# Altium PCB Copy of MB1363.PcbDoc (part 1 of 6)
Units mm, origin at the board's own origin, x right, y up, seen from the top; angles counter-clockwise.
Board outline 60.78 x 109.88 mm, 4 copper layers (Top Layer, Signal Layer 1, Signal Layer 2, Bottom Layer), stack 0.453 mm thick; 231 components, 215 nets, 716 pads, 2915 vias.
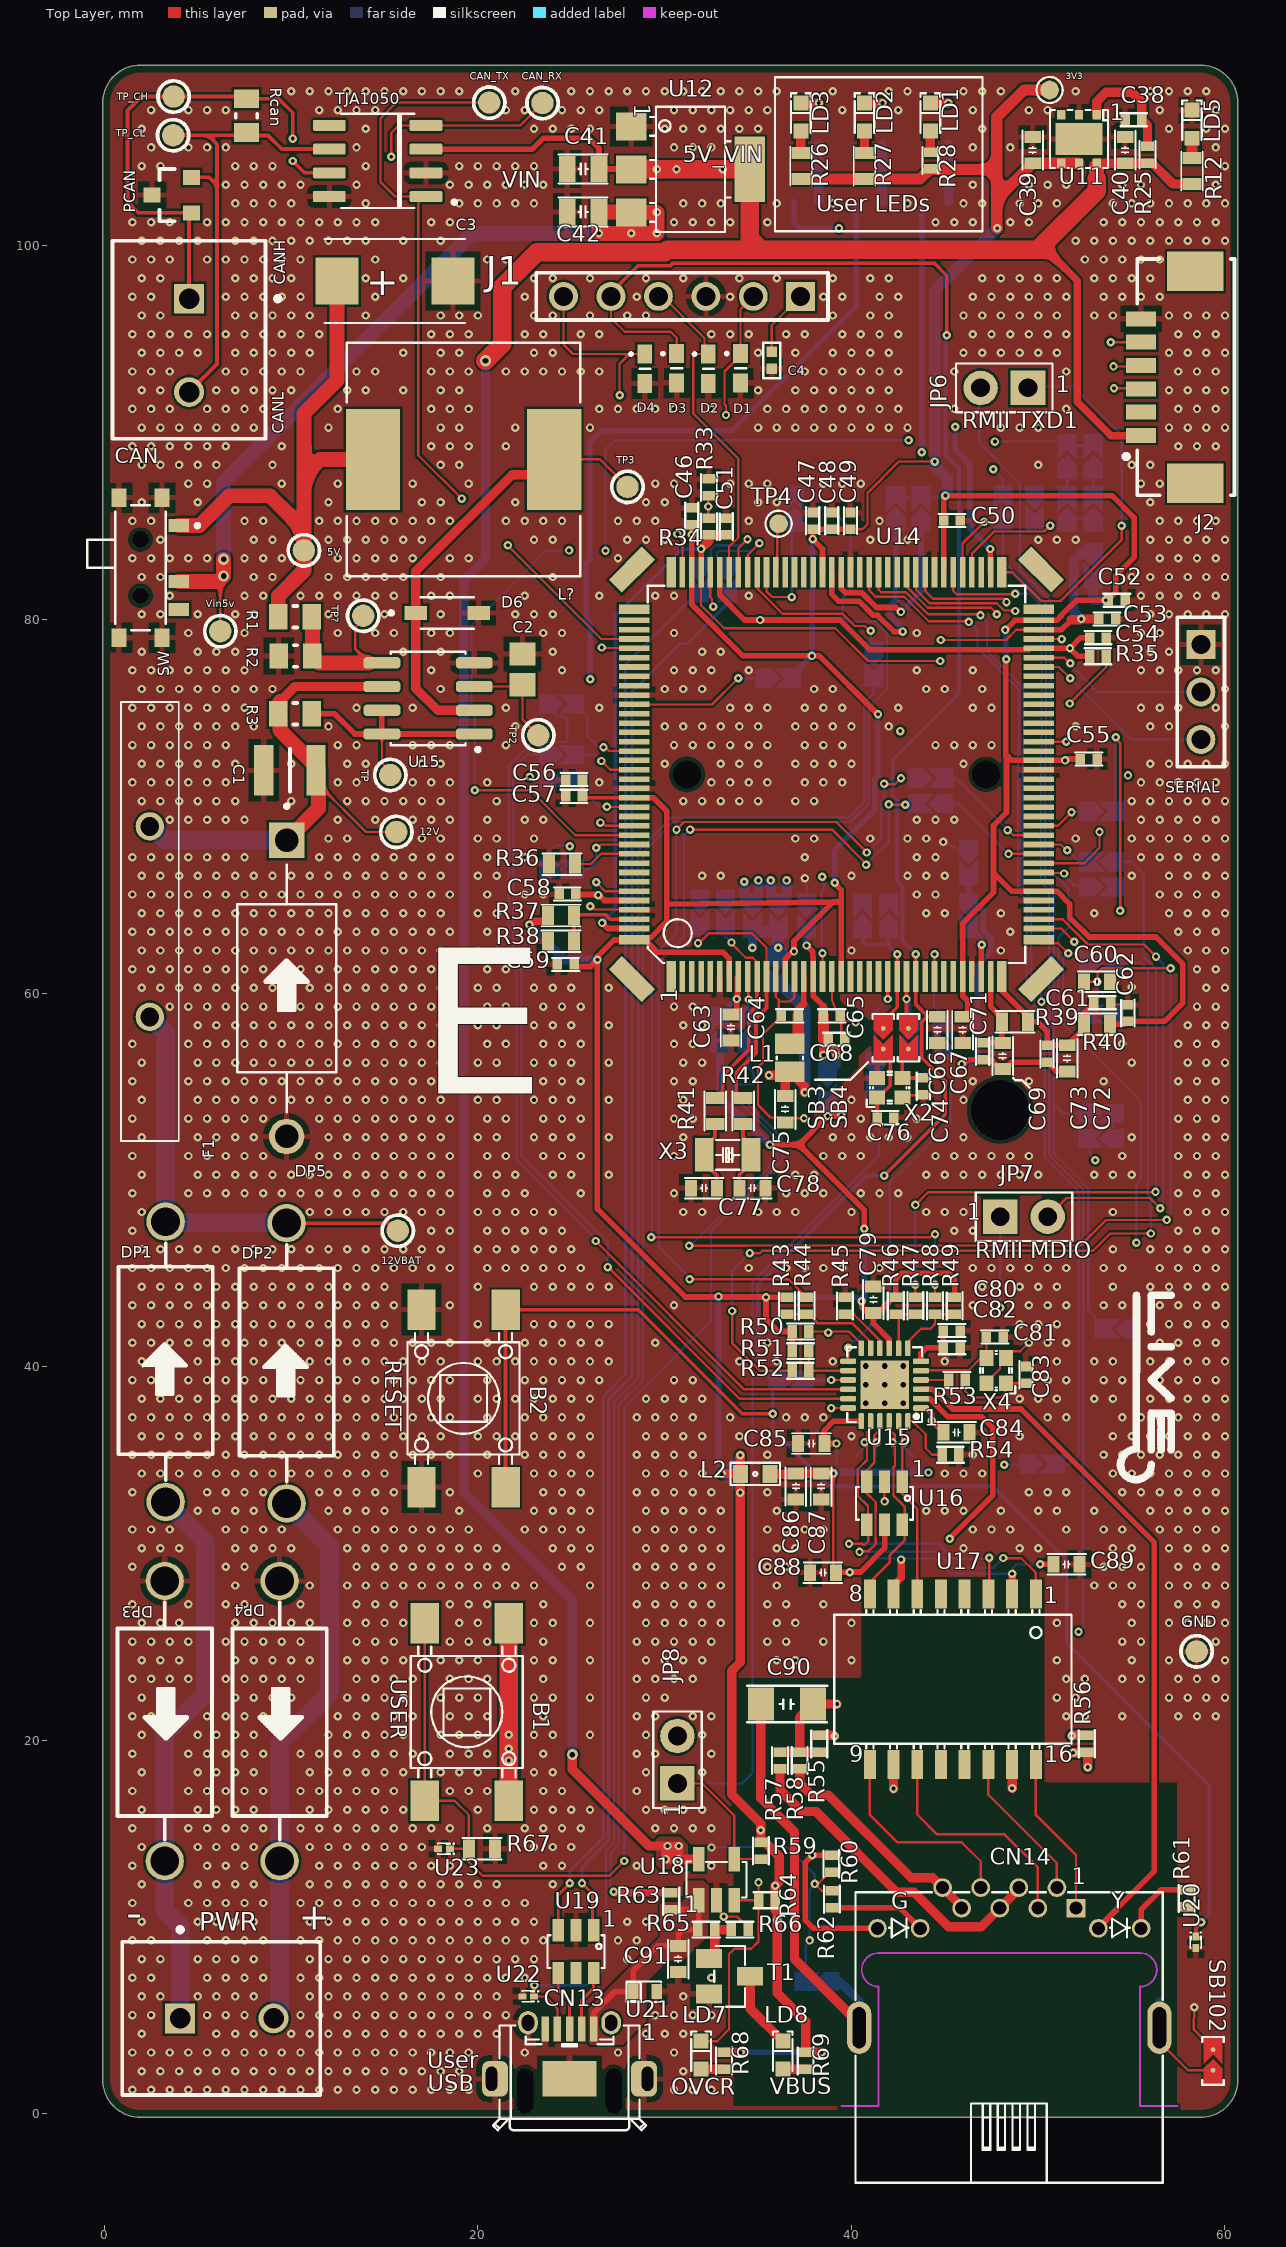
[diagram p0: Top Layer view]
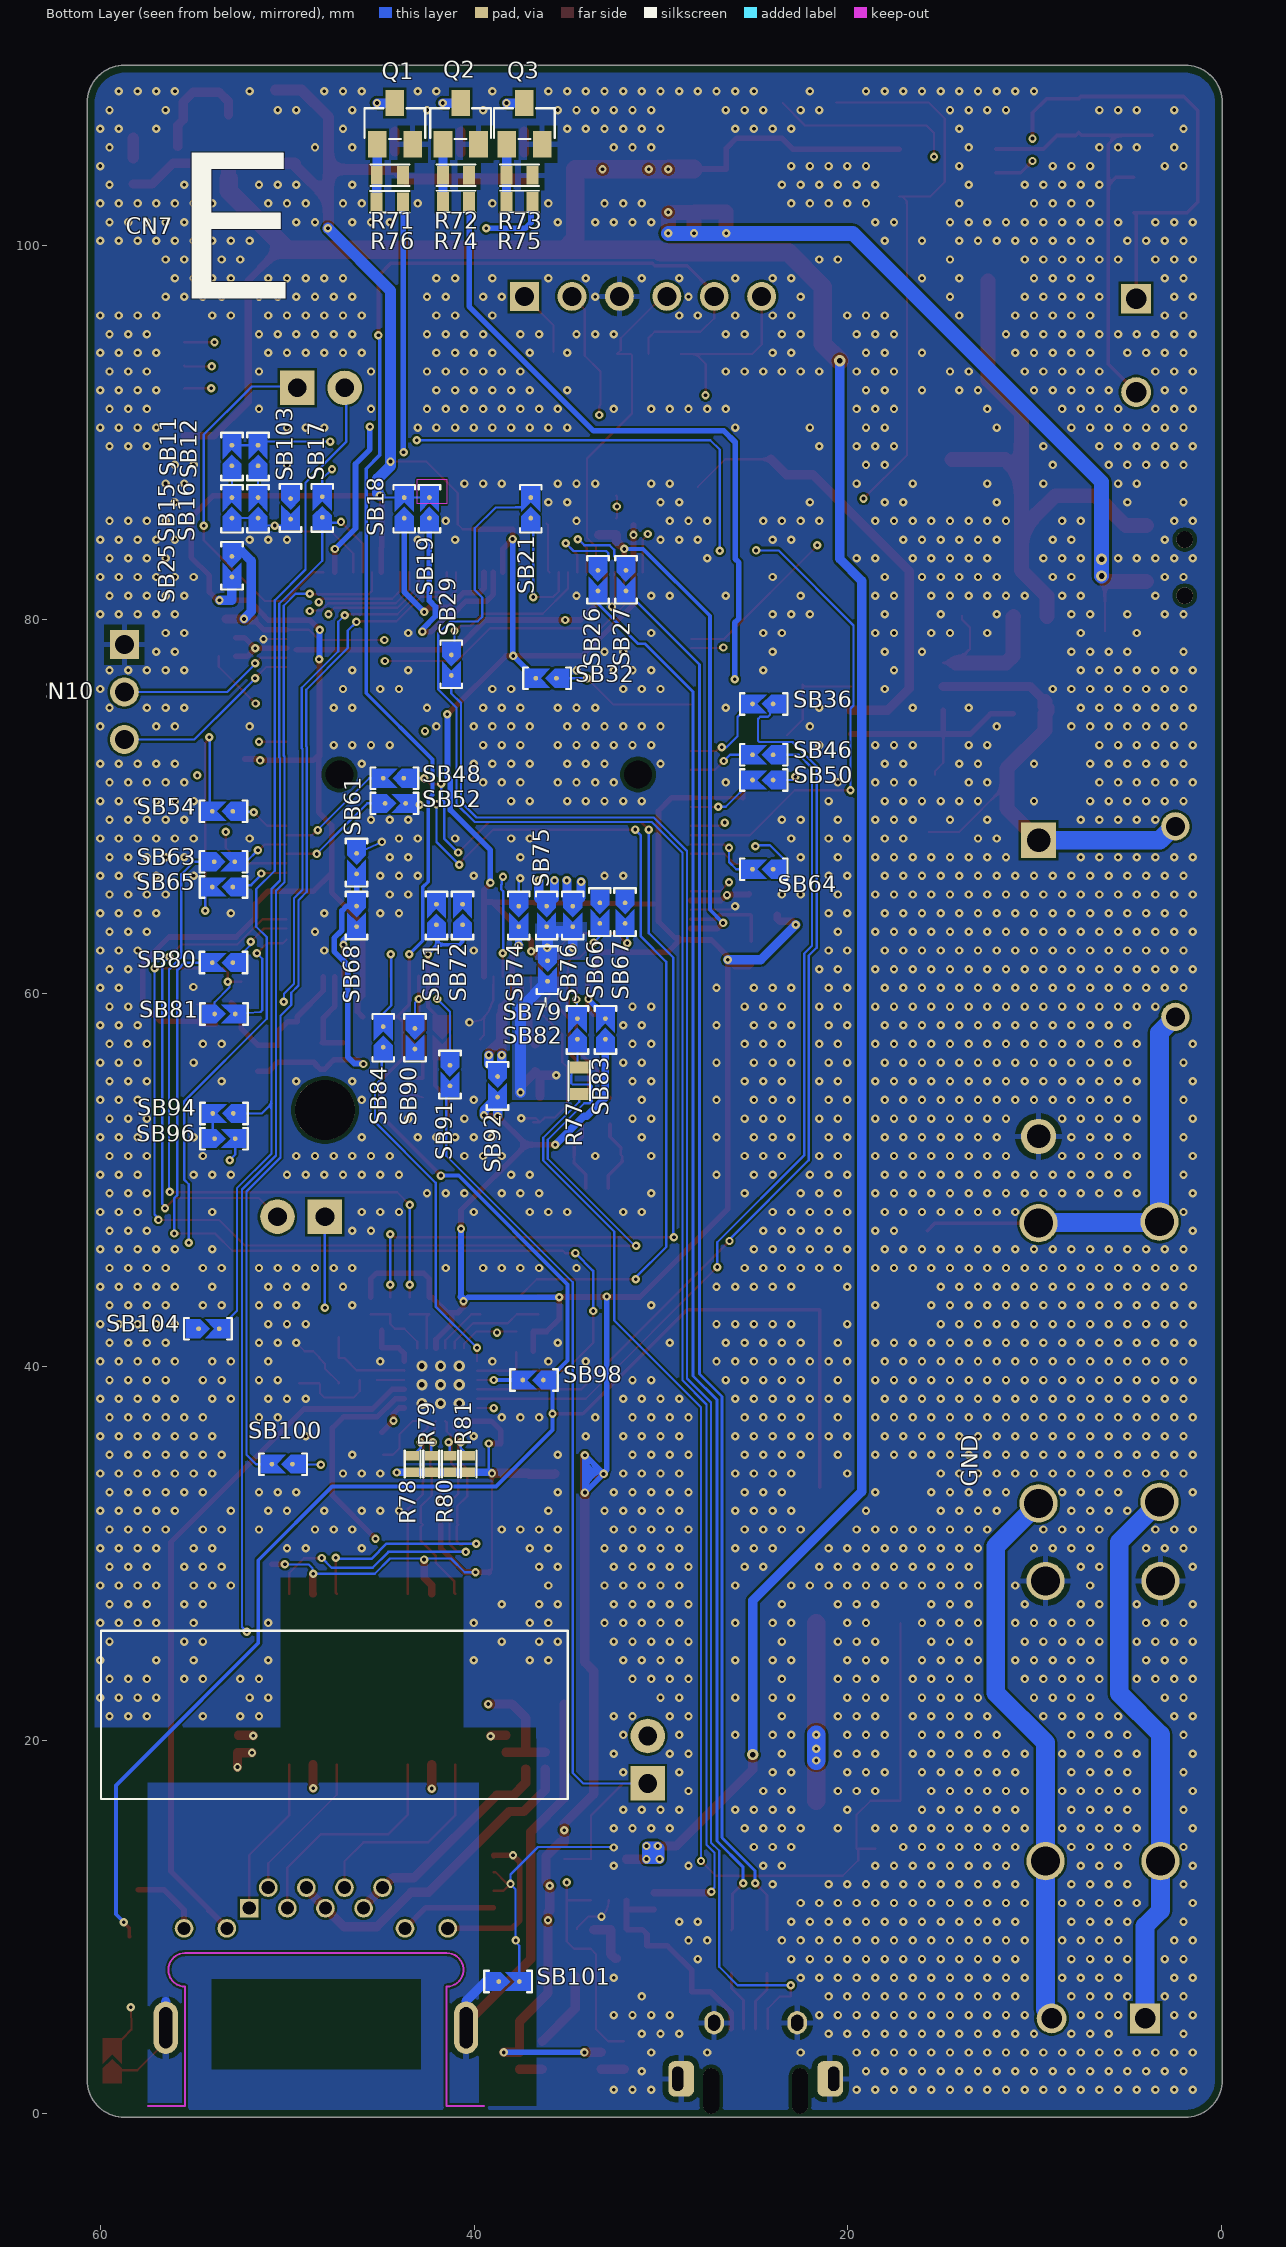
[diagram p1: Bottom Layer view, seen from below]
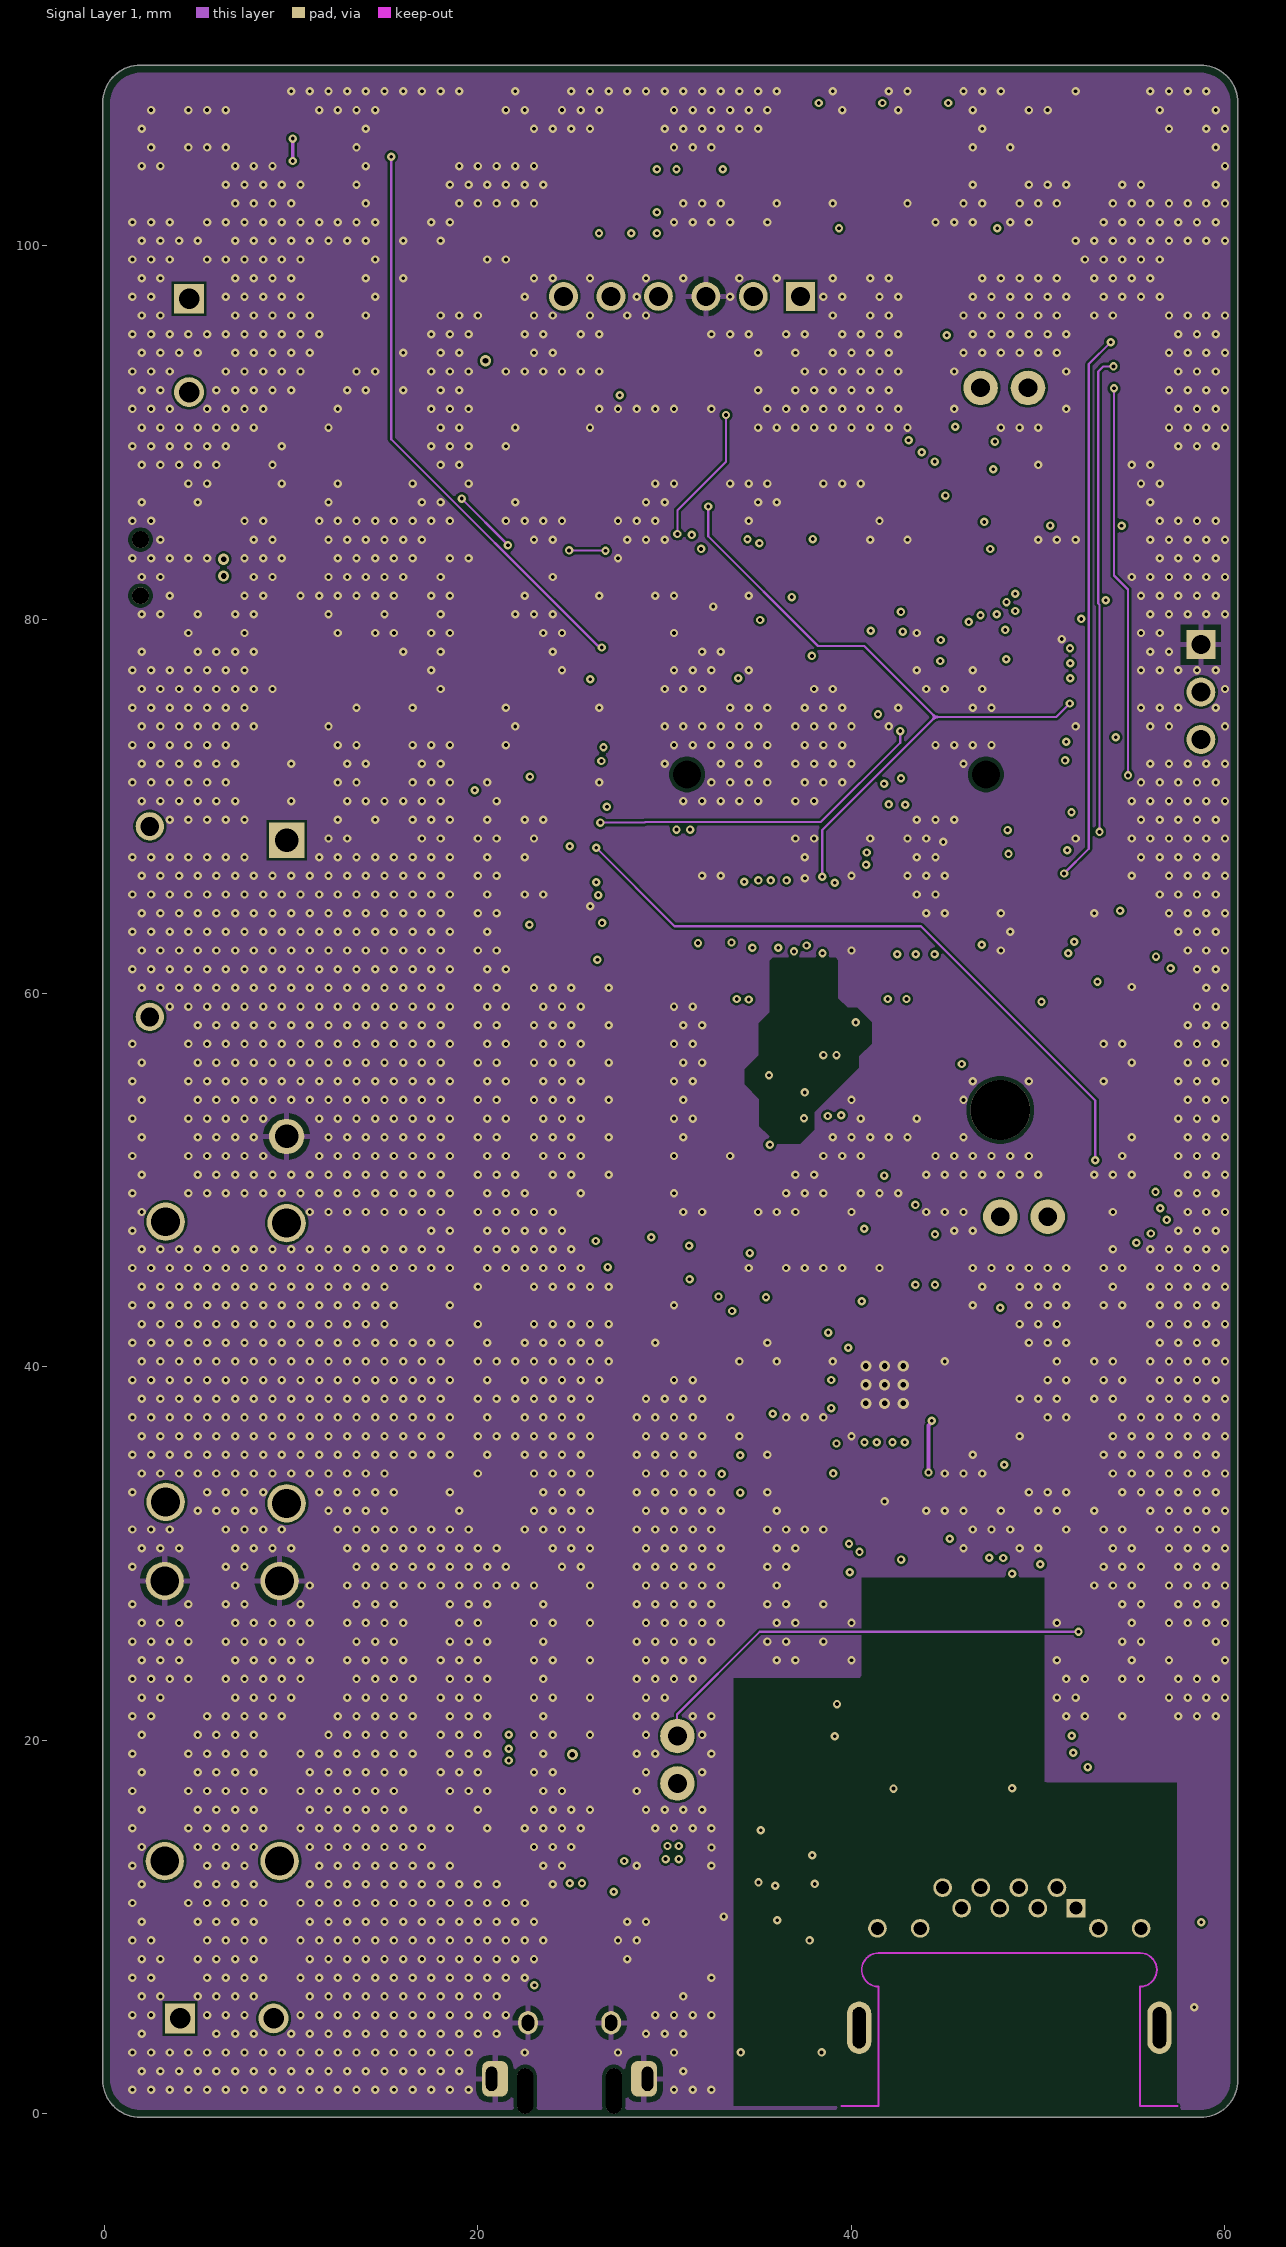
[diagram p2: Signal Layer 1]
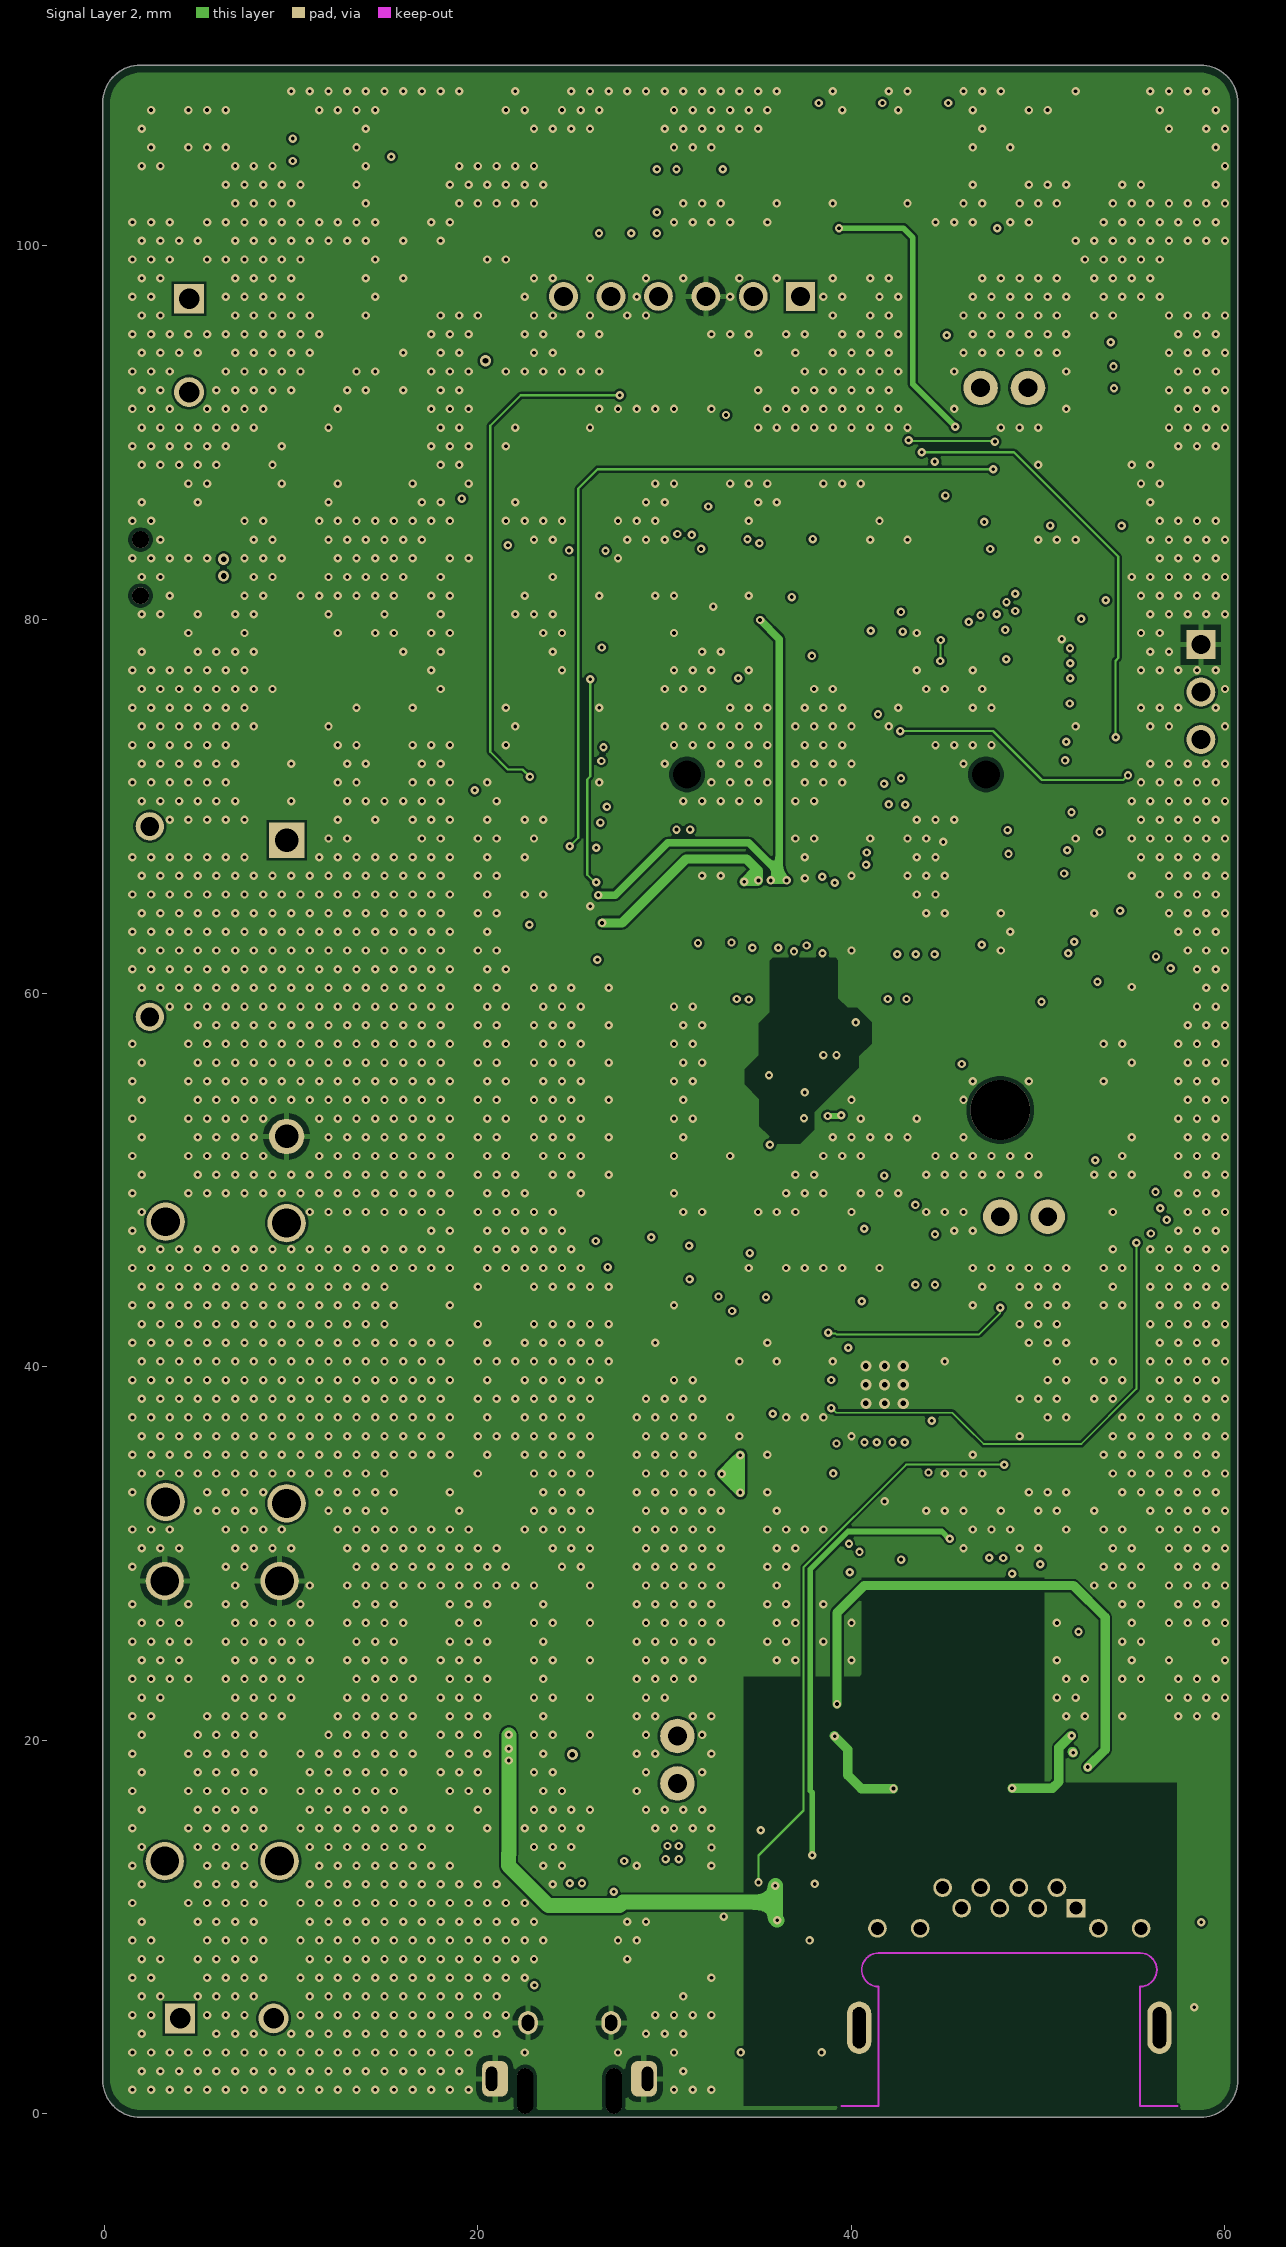
[diagram p3: Signal Layer 2]

## Layer stack, top to bottom
Top Solder: solder mask 0.015, Solder Resist, Dk 3.5
Top Layer: signal copper 0.042
Dielectric 1: prepreg 0.0991, FR-4, Dk 4.2
Signal Layer 1: signal copper 0.0348
Dielectric 2: core 0.1016, Dk 4.2
Signal Layer 2: signal copper 0.0348
Dielectric 3: prepreg 0.0991, Dk 4.2
Bottom Layer: signal copper 0.042
Bottom Solder: solder mask 0.015, Solder Resist, Dk 3.5

## Board outline
-0.064,1.8 -0.064,107.675 cw(c1.936,107.675) 1.936,109.675 58.711,109.675 cw(c58.711,107.675) 60.711,107.675 60.711,1.8 cw(c58.711,1.8) 58.711,-0.2 1.936,-0.2 cw(c1.936,1.8)

## Design rules (kind name [scope] priority, off if disabled: settings)
BoardOutlineClearance [All] p1: gap=0.4 ignorepadtopadclearanceinfootprint=FALSE
Clearance Clearance_GND_L1-1 [InNamedPolygon('GND_L01_P090')] p1: gap=0.4 ignorepadtopadclearanceinfootprint=TRUE
Clearance Clearance_GND_L1-2 [InNamedPolygon('GND_L01_P024')] p2: gap=0.4 ignorepadtopadclearanceinfootprint=TRUE
Clearance Clearance_GND_L3-1 [InNamedPolygon('GND_L03_P092')] p3: gap=0.4 ignorepadtopadclearanceinfootprint=TRUE
Clearance Clearance_GND_L3-2 [InNamedPolygon('GND_L03_P094')] p4: gap=0.4 ignorepadtopadclearanceinfootprint=TRUE
Clearance Clearance_GND_L3-3 [InNamedPolygon('GND_L03_P096')] p5: gap=0.4 ignorepadtopadclearanceinfootprint=TRUE
Clearance Clearance_GND_L3-4 [InNamedPolygon('GND_L03_P098')] p6: gap=0.4 ignorepadtopadclearanceinfootprint=TRUE
Clearance Clearance_GND_L4-1 [InNamedPolygon('GND_L04_P102')] p7: gap=0.4 ignorepadtopadclearanceinfootprint=TRUE
Clearance Clearance_GND_L4-2 [InNamedPolygon('GND_L04_P106')] p8: gap=0.4 ignorepadtopadclearanceinfootprint=TRUE
Clearance Clearance_GND_L4-3 [InNamedPolygon('GND_L04_P000')] p9: gap=0.4 ignorepadtopadclearanceinfootprint=TRUE
Clearance Clearance_GND_L6-1 [InNamedPolygon('GND_L06_P112')] p10: gap=0.4 ignorepadtopadclearanceinfootprint=TRUE
Clearance Clearance_GND_L6-2 [InNamedPolygon('GND_L06_P114')] p11: gap=0.4 ignorepadtopadclearanceinfootprint=TRUE
Clearance Clearance_RMII_SINGLE_50R [InNetClass('NC_RMII_SINGLE_50R')] p12: gap=0.12 ignorepadtopadclearanceinfootprint=TRUE except(0.2: Arc-Hole Track-Hole SMDPad-SMDPad SMDPad-THPad SMDPad-Hole THPad-THPad THPad-Hole Via-Via Via-Hole Fill-Hole Poly-Hole Region-Hole Text-Hole; 0.3: Arc-Fill Arc-Poly Track-Track Track-Fill Track-Poly SMDPad-Fill SMDPad-Poly THPad-Fill THPad-Poly Via-Fill Via-Poly Fill-Fill Fill-Poly Poly-Poly)
Clearance Clearance_VCP_ISO300 [InNetClass('NC_VCP_ISO300')] p13: gap=0.12 ignorepadtopadclearanceinfootprint=TRUE except(0.2: Arc-Hole Track-Hole SMDPad-SMDPad SMDPad-THPad SMDPad-Hole THPad-THPad THPad-Hole Via-Via Via-Hole Fill-Hole Poly-Hole Region-Hole Text-Hole; 0.3: Arc-Fill Arc-Poly Track-Track Track-Fill Track-Poly SMDPad-Fill SMDPad-Poly THPad-Fill THPad-Poly Via-Fill Via-Poly Fill-Fill Fill-Poly Poly-Poly)
Clearance Clearance_USB_DIFF_90R [InNetClass('NC_USB_DIFF_90R')] p14: gap=0.12 ignorepadtopadclearanceinfootprint=TRUE except(0.2: Arc-Hole Track-Hole SMDPad-SMDPad SMDPad-THPad SMDPad-Hole THPad-THPad THPad-Hole Via-Via Via-Hole Fill-Hole Poly-Hole Region-Hole Text-Hole; 0.3: Arc-Fill Arc-Poly Track-Fill Track-Poly SMDPad-Fill SMDPad-Poly THPad-Fill THPad-Poly Via-Fill Via-Poly Fill-Fill Fill-Poly Poly-Poly)
Clearance Clearance_RXTX_DIFF_100R [InNetClass('NC_RXTX_DIFF_100R')] p15: gap=0.12 ignorepadtopadclearanceinfootprint=TRUE except(0.2: Arc-Hole Track-Hole SMDPad-SMDPad SMDPad-THPad SMDPad-Hole THPad-THPad THPad-Hole Via-Via Via-Hole Fill-Hole Poly-Hole Region-Hole Text-Hole; 0.3: Arc-Fill Arc-Poly Track-Fill Track-Poly SMDPad-Fill SMDPad-Poly THPad-Fill THPad-Poly Via-Fill Via-Poly Fill-Fill Fill-Poly Poly-Poly)
Clearance Clearance_STLK_ISO200 [InNetClass('NC_STLK_W200-ISO200')] p16: gap=0.12 ignorepadtopadclearanceinfootprint=TRUE except(0.2: Arc-Poly Arc-Hole Track-Track Track-Poly Track-Hole SMDPad-SMDPad SMDPad-THPad SMDPad-Poly SMDPad-Hole THPad-THPad THPad-Poly THPad-Hole Via-Via Via-Poly Via-Hole Fill-Poly Fill-Hole Poly-Poly Poly-Hole Region-Hole Text-Hole; 0.3: Arc-Fill Track-Fill SMDPad-Fill THPad-Fill Via-Fill Fill-Fill)
Clearance [All] p17: gap=0.12 ignorepadtopadclearanceinfootprint=TRUE except(0.2: Arc-Hole Track-Hole SMDPad-SMDPad SMDPad-THPad SMDPad-Hole THPad-THPad THPad-Hole Via-Via Via-Hole Fill-Hole Poly-Hole Region-Hole Text-Hole; 0.3: Arc-Fill Track-Fill SMDPad-Fill THPad-Fill Via-Fill Fill-Fill)
ComponentClearance [All] p1: gap=0 collisioncheckmode=3 verticalgap=0 showdistances=FALSE
DiffPairsRouting DiffPairsRouting_USB_90R [InDifferentialPairClass('DPC_USB_DIFF_90R')] p1: maxlimit=0.252 minlimit=0.226 mostfreqgap=0.252 toplayer_maxgap=0.226 toplayer_prefgap=0.226 toplayer_minwidth=0.155 toplayer_maxwidth=0.155 toplayer_prefwidth=0.155 midlayer1_maxgap=0.226 midlayer1_prefgap=0.226 midlayer1_minwidth=0.155 midlayer1_maxwidth=0.155 midlayer1_prefwidth=0.155 midlayer2_mingap=0.252 midlayer2_minwidth=0.13 midlayer2_maxwidth=0.13 midlayer2_prefwidth=0.13 bottomlayer_maxgap=0.226 bottomlayer_prefgap=0.226 bottomlayer_minwidth=0.155 bottomlayer_maxwidth=0.155 bottomlayer_prefwidth=0.155 maxuncoupledlength=12.7
DiffPairsRouting DiffPairsRouting_RXTX_100R [InDifferentialPairClass('DPC_RXTX_DIFF_100R')] p2: maxlimit=0.277 minlimit=0.252 mostfreqgap=0.277 toplayer_maxgap=0.252 toplayer_prefgap=0.252 toplayer_minwidth=0.11 toplayer_maxwidth=0.13 toplayer_prefwidth=0.13 midlayer1_maxgap=0.252 midlayer1_prefgap=0.252 midlayer1_minwidth=0.13 midlayer1_maxwidth=0.13 midlayer1_prefwidth=0.13 midlayer2_mingap=0.277 midlayer2_minwidth=0.104 midlayer2_maxwidth=0.104 midlayer2_prefwidth=0.104 bottomlayer_maxgap=0.252 bottomlayer_prefgap=0.252 bottomlayer_minwidth=0.11 bottomlayer_maxwidth=0.13 bottomlayer_prefwidth=0.13 maxuncoupledlength=12.7
FabricationTestPointUsage TestPointUsage [All] p1: valid=0 allowmultiple=FALSE
FabricationTestpoint Testpoint [(IsPad And (OnTopLayer Or OnBottomLayer))] p1: side=3 testpointundercomponent=TRUE minsize=1.016 maxsize=2.54 preferedsize=1.524 minholesize=0 maxholesize=1.016 preferedholesize=0.813 testpointgrid=0.025 allowsidetop=TRUE allowsidebottom=TRUE usegrid=TRUE gridtolerance=0
HoleSize [All] p1: absolutevalues=TRUE maxlimit=3.81 minlimit=0.025 maxpercent=80.000 minpercent=20.000
MinimumSolderMaskSliver [All] p1: minsoldermaskwidth=0
PolygonConnect PolygonConnect_10 [All vs IsNamedPolygon('USB_FS_VBUS_L01_P068')] p1: connectstyle=Direct reliefconductorwidth=0.254 reliefentries=4 polygonreliefangle="90 Angle" airgapwidth=0.254
PolygonConnect PolygonConnect_9 [All vs IsNamedPolygon('5V_L03_P060')] p2: connectstyle=Direct reliefconductorwidth=0.254 reliefentries=4 polygonreliefangle="90 Angle" airgapwidth=0.254
PolygonConnect PolygonConnect_8 [All vs IsNamedPolygon('5V_L01_P058')] p3: connectstyle=Direct reliefconductorwidth=0.254 reliefentries=4 polygonreliefangle="90 Angle" airgapwidth=0.254
PolygonConnect PolygonConnect_7 [All vs IsNamedPolygon('3V3_STLK_L04_P044')] p4: connectstyle=Direct reliefconductorwidth=0.254 reliefentries=4 polygonreliefangle="90 Angle" airgapwidth=0.254
PolygonConnect PolygonConnect_6 [All vs IsNamedPolygon('5V_USB_CHGR_L04_P042')] p5: connectstyle=Direct reliefconductorwidth=0.254 reliefentries=4 polygonreliefangle="90 Angle" airgapwidth=0.254
PolygonConnect PolygonConnect_5 [All vs IsNamedPolygon('5V_L01_P038')] p6: connectstyle=Direct reliefconductorwidth=0.254 reliefentries=4 polygonreliefangle="90 Angle" airgapwidth=0.254
PolygonConnect PolygonConnect_4 [All vs IsNamedPolygon('5V_L01_P038')] p7: thpad.connectstyle=Relief thpad.reliefconductorwidth=0.4 thpad.reliefentries=4 thpad.polygonreliefangle="90 Angle" thpad.airgapwidth=0.4 smdpad.connectstyle=Direct smdpad.reliefconductorwidth=0.254 smdpad.reliefentries=4 smdpad.polygonreliefangle="90 Angle" smdpad.airgapwidth=0.254 via.connectstyle=Direct via.reliefconductorwidth=0.254 via.reliefentries=4 via.polygonreliefangle="90 Angle" via.airgapwidth=0.254
PolygonConnect PolygonConnect_3 [All vs IsNamedPolygon('5V_VIN_L01_P028')] p8: connectstyle=Direct reliefconductorwidth=0.254 reliefentries=4 polygonreliefangle="90 Angle" airgapwidth=0.254
PolygonConnect PolygonConnect_2 [All vs IsNamedPolygon('VIN_L01_P026')] p9: connectstyle=Direct reliefconductorwidth=0.254 reliefentries=4 polygonreliefangle="90 Angle" airgapwidth=0.254
PolygonConnect PolygonConnect_1 [All vs IsNamedPolygon('GND_L01_P024')] p10: connectstyle=Direct reliefconductorwidth=0.254 reliefentries=4 polygonreliefangle="90 Angle" airgapwidth=0.254
PolygonConnect [All] p11: thpad.connectstyle=Relief thpad.reliefconductorwidth=0.3 thpad.reliefentries=4 thpad.polygonreliefangle="90 Angle" thpad.airgapwidth=0.3 smdpad.connectstyle=Relief smdpad.reliefconductorwidth=0.3 smdpad.reliefentries=4 smdpad.polygonreliefangle="90 Angle" smdpad.airgapwidth=0.3 via.connectstyle=Direct via.reliefconductorwidth=0.254 via.reliefentries=4 via.polygonreliefangle="90 Angle" via.airgapwidth=0.254
RoomDefinition U_USB [InComponentClass('U_USB')] p1: confinementstyle=ConfineIn formatcopy=TRUE lockcomponents=FALSE outline -1262.483,-905.725 -1211.683,-905.725 -1211.683,-880.325 -1262.483,-880.325
RoomDefinition U_Power_Board [InComponentClass('U_Power_Board')] p2: confinementstyle=ConfineIn formatcopy=TRUE lockcomponents=FALSE outline -1262.483,-905.725 -1211.683,-905.725 -1211.683,-880.325 -1262.483,-880.325
RoomDefinition U_MCU_144_POWER [InComponentClass('U_MCU_144_POWER')] p3: confinementstyle=ConfineIn formatcopy=TRUE lockcomponents=FALSE outline -1262.483,-905.725 -1211.683,-905.725 -1211.683,-880.325 -1262.483,-880.325
RoomDefinition U_MCU_144_IOs [InComponentClass('U_MCU_144_IOs')] p4: confinementstyle=ConfineIn formatcopy=TRUE lockcomponents=FALSE outline -1262.483,-905.725 -1211.683,-905.725 -1211.683,-880.325 -1262.483,-880.325
RoomDefinition U_Ethernet [InComponentClass('U_Ethernet')] p5: confinementstyle=ConfineIn formatcopy=TRUE lockcomponents=FALSE outline -1262.483,-905.725 -1211.683,-905.725 -1211.683,-880.325 -1262.483,-880.325
RoomDefinition U_Connectors [InComponentClass('U_Connectors')] p6: confinementstyle=ConfineIn formatcopy=TRUE lockcomponents=FALSE outline -1262.483,-905.725 -1211.683,-905.725 -1211.683,-880.325 -1262.483,-880.325
RoutingLayers RoutingLayers_USB_DIFF_90R [InDifferentialPairClass('DPC_USB_DIFF_90R')] p1: top layer_v5=TRUE mid layer 1_v5=TRUE mid layer 2_v5=TRUE bottom layer_v5=TRUE
RoutingLayers RoutingLayers_RXTX_DIFF_100R [InDifferentialPairClass('DPC_RXTX_DIFF_100R')] p2: top layer_v5=TRUE mid layer 1_v5=TRUE mid layer 2_v5=TRUE bottom layer_v5=TRUE
RoutingLayers RoutingLayers_RMII_SINGLE_50R [InNetClass('NC_RMII_SINGLE_50R')] p3: top layer_v5=TRUE mid layer 1_v5=TRUE mid layer 2_v5=TRUE bottom layer_v5=TRUE
RoutingVias RoutingVias_Default [All] p1: holewidth=0.2 width=0.45 viastyle="Through Hole" minholewidth=0.2 minwidth=0.45 maxholewidth=0.2 maxwidth=0.45
SilkToSilkClearance [All] p1: silktosilkclearance=0.102
SilkToSolderMaskClearance SilkscreenOverComponentPads [IsPad] p1: minsilkscreentomaskgap=0.102 clearancetoexposedcopper=TRUE
SolderMaskExpansion [All] p1: expansion=0.102 istentingtop=FALSE
SupplyNets "Schematic Supply Nets_4" [InNet('+VSYS')] p1: voltage=0.000
SupplyNets "Schematic Supply Nets_25" [InNet('3V3')] p2: voltage=0.000
SupplyNets "Schematic Supply Nets_24" [InNet('VDD_SMPS_IN')] p3: voltage=0.000
SupplyNets "Schematic Supply Nets_23" [InNet('AGND')] p4: voltage=0.000
SupplyNets "Schematic Supply Nets_21" [InNet('SHGND')] p5: voltage=0.000
SupplyNets "Schematic Supply Nets_20" [InNet('GND')] p6: voltage=0.000
SupplyNets "Schematic Supply Nets_17" [InNet('VDDA')] p7: voltage=0.000
SupplyNets "Schematic Supply Nets_15" [InNet('VFBSD')] p8: voltage=0.000
SupplyNets "Schematic Supply Nets_11" [InNet('VREFP')] p9: voltage=0.000
SupplyNets "Schematic Supply Nets_10" [InNet('VDD_SMPS_IND_OUT')] p10: voltage=0.000
SupplyNets "Schematic Supply Nets_9" [InNet('1V2_MCU')] p11: voltage=0.000
SupplyNets "Schematic Supply Nets_8" [InNet('VBAT')] p12: voltage=0.000
SupplyNets "Schematic Supply Nets_7" [InNet('5V')] p13: voltage=0.000
SupplyNets "Schematic Supply Nets_5" [InNet('VDD_SMPS_OUT')] p14: voltage=0.000
SupplyNets "Schematic Supply Nets_3" [InNet('VIN')] p15: voltage=0.000
SupplyNets "Schematic Supply Nets_2" [InNet('VDD_LDO')] p16: voltage=0.000
SupplyNets "Schematic Supply Nets_1" [InNet('VCAP')] p17: voltage=0.000
Width Width_RMII_SINGLE_50R [InNetClass('NC_RMII_SINGLE_50R')] p1: maxlimit=0.127 minlimit=0.102 preferedwidth=0.127 toplayer_minwidth=0.127 midlayer1_minwidth=0.127 midlayer2_maxwidth=0.102 midlayer2_prefwidth=0.102 bottomlayer_minwidth=0.127 minimp=50.000000 maximp=50.000000 favimp=50.000000
Width Width_POWER_300u [InNetClass('NC_POWER_300u')] p2: maxlimit=10 minlimit=0.12 preferedwidth=0.3 minimp=50.000000 maximp=50.000000 favimp=50.000000
Width Width_GROUND [InNetClass('NC_GROUND')] p3: maxlimit=10 minlimit=0.12 preferedwidth=0.3 minimp=50.000000 maximp=50.000000 favimp=50.000000
Width Width_POWER_500u [InNetClass('NC_POWER_500u')] p4: maxlimit=10 minlimit=0.12 preferedwidth=0.5 minimp=50.000000 maximp=50.000000 favimp=50.000000
Width Width_POWER_SMPS [InNetClass('NC_POWER_SMPS')] p5: maxlimit=10 minlimit=0.12 preferedwidth=0.5 minimp=50.000000 maximp=50.000000 favimp=50.000000
Width Width_STLK_W200 [InNetClass('NC_STLK_W200-ISO200')] p6: maxlimit=10 minlimit=0.2 preferedwidth=0.2 minimp=50.000000 maximp=50.000000 favimp=50.000000
Width Width_RD_N [InNet('RD_N')] p7: maxlimit=10 minlimit=0.11 preferedwidth=0.12 toplayer_maxwidth=0.11 toplayer_prefwidth=0.11 midlayer1_minwidth=0.12 midlayer2_minwidth=0.12 bottomlayer_maxwidth=0.11 bottomlayer_prefwidth=0.11 minimp=50.000000 maximp=50.000000 favimp=50.000000
Width Width_TD_P [InNet('TD_P')] p8: maxlimit=10 minlimit=0.11 preferedwidth=0.12 toplayer_maxwidth=0.11 toplayer_prefwidth=0.11 midlayer1_minwidth=0.12 midlayer2_minwidth=0.12 bottomlayer_maxwidth=0.11 bottomlayer_prefwidth=0.11 minimp=50.000000 maximp=50.000000 favimp=50.000000
Width [All] p9: maxlimit=10 minlimit=0.12 preferedwidth=0.12 minimp=50.000000 maximp=50.000000 favimp=50.000000
21 further rules are at their usual default settings.

## Classes and differential pairs
polygon class GND_TOP: 5V_L01_P064
component class U_ST_LINK_V3E: C4 D1 D2 D3 D4 J1
component class U_CAN_TJA1050_Page1: CAN_RX CAN_TX PCAN Rcan TJA1050 TP_CH TP_CL
component class U_12V_Regulator: 5V 12V 12VBAT C1 C2 C3 D6 DP1 DP2 DP3 DP4 DP5 F1 GND L? R1 R2 R3 SW TP TP2 TP3 TP? U15 Vin5v
net class PH[0..1]: PH0 PH1
net class PG[6..14]: PG6 PG7 PG8 PG9 PG10 PG11 PG12 PG13 PG14
net class PF[6..15]: PF6 PF7 PF8 PF9 PF10 PF11 PF14 PF15
net class PE[0..15]: PE0 PE1 PE2 PE3 PE4 PE5 PE6 PE7 PE8 PE9 PE10 PE11 PE12 PE13 PE14 PE15
net class PD[0..15]: PD0 PD1 PD2 PD3 PD4 PD5 PD6 PD7 PD8 PD9 PD10 PD11 PD12 PD13 PD14 PD15
net class PC[0..15]: PC0 PC1 PC2 PC3 PC4 PC5 PC6 PC7 PC8 PC9 PC10 PC11 PC12 PC13 PC14 PC15
net class PB[0..15]: PB0 PB1 PB2 PB3 PB4 PB5 PB6 PB7 PB8 PB9 PB10 PB11 PB12 PB13 PB14 PB15
net class PA[0..15]: PA0 PA1 PA2 PA3 PA4 PA5 PA6 PA7 PA8 PA9 PA10 PA11 PA12 PA13 PA14 PA15
component class U_USB: C91 CN13 LD7 LD8 R59 R64 R65 R66 R68 R69 T1 U18 U19 U21 U22
component class U_Power_Board: 3V3 C38 C39 C40 C41 C42 HW4 HW13 LD5 R12 R25 U11 U12
component class U_MCU_144_POWER: C46 C47 C48 C49 C50 C51 C52 C53 C54 C55 C56 C57 C58 C59 C61 C62 C63 C64 C65 C67 C68 C69 C71 C72 C73 C75 HW12 L1 R33 R34 R35 R39 R40 SB18 SB19 SB25 SB32 SB61 SB68 SB74 SB75 SB76 SB79 SB83 SB92
component class U_MCU_144_IOs: B1 B2 C60 C66 C74 C76 C77 C78 HW3 HW9 HW11 HW14 HW15 JP6 JP7 JP8 R36 R37 R38 R41 R42 R63 R67 R77 SB3 SB4 SB11 SB12 SB15 SB16 SB17 SB21 SB26 SB27 SB29 SB36 SB46 SB48 SB50 SB52 SB63 SB64 SB66 SB67 SB71 SB72 SB80 SB81 SB82 SB84 SB90 SB91 SB94 SB96 SB100 SB103 SB104 TP4 U14 U20 U23 X2 X3
component class U_Ethernet: C79 C80 C81 C82 C83 C84 C85 C86 C87 C88 C89 C90 CN14 L2 R43 R44 R45 R46 R47 R48 R49 R50 R51 R52 R53 R54 R55 R56 R57 R58 R60 R61 R62 R78 R79 R80 R81 SB98 SB101 SB102 U15 U16 U17 X4
component class U_Connectors: CAN HW1 HW2 J2 LD1 LD2 LD3 PWR Q1 Q2 Q3 R26 R27 R28 R71 R72 R73 R74 R75 R76 SB54 SB65 SERIAL
differential pair RD: +RD_P -RD_N
differential pair RX: +RX_P -RX_N
differential pair TD: +TD_P -TD_N
differential pair TX: +TX_P -TX_N
differential pair USB_FS: +USB_FS_P -USB_FS_N

## Components (designator, comment, footprint, x,y, rotation, side; value= is the part's Value field where it differs from the comment)
3V3 "Test Point" TP_SMD_1MM 50.625,108.35 r270 top (schematic designator TP1)
5V "" TestPoint 10.7,83.7 r90 top
12V "" TestPoint 15.65,68.625 r90 top
12VBAT "" TestPoint 15.725,47.275 r90 top
B1 "SW-PUSH-CMS" SWI_WEALTHMETAL_TD-0341_4P_BLUE 19.423,21.508 r180 top locked value=SWITCH
B2 "SW-PUSH-CMS" SWI_WEALTHMETAL_TD-0341_4P_BLACK 19.248,38.297 r180 top locked value=SWITCH
C1 "100uF" CAP_100uF 9.95,71.925 r0 top
C2 "470pF" Capacitor_SMD_0805_Generic 22.4,77.325 r90 top
C3 "470uF" Capacitor_470uF 15.575,98.125 r0 top
C4 "100nF" 0402 35.75,93.875 r270 top
C38 "Capacitor" C0402 55.118,106.753 r180 top value=100nF
C39 "Capacitor" C0603 49.718,105.128 r270 top value=4.7uF
C40 "Capacitor" C0603 54.668,105.128 r270 top value=4.7uF
C41 "Capacitor" C0805 25.65,104.12 r0 top value=10uF
C42 "Capacitor" C0805 25.65,101.82 r0 top value=10uF
C46 "Capacitor" C0402 31.466,85.529 r270 top value=100nF
C47 "Capacitor" C0402 37.939,85.279 r270 top value=100nF
C48 "Capacitor" C0402 38.966,85.279 r270 top value=100nF
C49 "Capacitor" C0402 39.966,85.279 r270 top value=100nF
C50 "Capacitor" C0402 45.4,85.3 r180 top value=100nF
C51 "Capacitor" C0402 33.316,84.979 r90 top value=100nF
C52 "Capacitor" C0402 54.216,81.029 r180 top value=100nF
C53 "Capacitor" C0402 53.716,80.029 r0 top value=100nF
C54 "Capacitor" C0402 53.216,79.029 r180 top value=100nF
C55 "Capacitor" C0402 52.716,72.529 r180 top value=100nF
C56 "Capacitor" C0402 25.166,71.429 r0 top value=100nF
C57 "Capacitor" C0402 25.166,70.529 r0 top value=100nF
C58 "Capacitor" C0402 24.816,65.304 r0 top value=100nF
C59 "Capacitor" C0402 24.716,61.529 r0 top value=100nF
C60 "Capacitor" C0603 53.166,60.604 r180 top value=100nF
C61 "Capacitor" C0402 53.441,59.479 r0 top value=100nF
C62 "Capacitor" C0402 54.816,58.929 r90 top value=100nF
C63 "Capacitor" C0603 33.566,58.154 r90 top value=1uF
C64 "Capacitor" C0402 36.716,58.779 r0 top value=220pF
C65 "Capacitor" C0402 38.966,58.779 r180 top value=10uF
C66 "Capacitor" C0603 44.616,58.029 r90 top value=100nF
C67 "Capacitor" C0603 45.966,58.029 r90 top value=4.7uF
C68 "Capacitor" C0402 39.216,57.529 r180 top value=10uF
C69 "Capacitor" C0603 48.116,56.629 r270 top value=1uF
C71 "Capacitor" C0402 47.041,56.879 r90 top value=100nF
C72 "Capacitor" C0603 51.566,56.504 r270 top value=1uF
C73 "Capacitor" C0402 50.491,56.754 r90 top value=100nF
C74 "Capacitor" C0402 43.866,55.004 r270 top value=5.6pF
C75 "Capacitor" C0603 36.466,53.779 r90 top value=10uF
C76 "Capacitor" C0402 41.841,53.329 r0 top value=5.6pF
C77 "Capacitor" C0603 32.116,49.554 r180 top value=5.1pF
C78 "Capacitor" C0603 34.716,49.554 r0 top value=5.1pF
C79 "Capacitor" C0603 41.191,43.579 r270 top value=100nF
C80 "Capacitor" C0402 45.391,41.929 r180 top value=1uF
C81 "Capacitor" C0402 47.691,41.579 r180 top value=5.6pF
C82 "Capacitor" C0402 45.391,41.004 r180 top value=470pF
C83 "Capacitor" C0402 49.366,39.554 r270 top value=5.6pF
C84 "Capacitor" C0603 45.641,36.479 r180 top value=100nF
C85 "Capacitor" C0603 37.866,35.879 r180 top value=100nF
C86 "Capacitor" C0603 37.041,33.579 r90 top value=100nF
C87 "Capacitor" C0603 38.391,33.579 r90 top value=10uF
C88 "Capacitor" C0603 38.496,28.966 r0 top value=100nF
C89 "Capacitor" C0603 51.529,29.409 r180 top value=100nF
C90 "Capacitor" C1206_H1P6 36.566,21.929 r0 top value=1nF
C91 "Capacitor" C0603 30.741,8.279 r90 top value=4.7uF
CAN "" TECO-282836-2_V 4.55,94.675 r270 top
CAN_RX "" TestPoint 23.475,107.65 r90 top
CAN_TX "" TestPoint 20.625,107.675 r90 top
CN13 "USB_uAB_47590.0001" CON_USBMICROAB_MOLEX_47590-0001_H3 24.923,0.414 r0 top locked value="USB uAB ZX62RD-AB-5P8(30)"
CN14 "RJ45_KRJ-CB4.2GYZNL" CON_RJ45_DGKYD_KRJ-CB4.2GYZNL 48.469,0.4 r0 top locked value=KRJ-CB4.2GYZNL
D1 "CG0603MLC-3.3LE" "ESD PROTECTOR" 34.075,93.45 r270 top
D2 "CG0603MLC-3.3LE" "ESD PROTECTOR" 32.35,93.425 r270 top
D3 "CG0603MLC-3.3LE" "ESD PROTECTOR" 30.658,93.444 r270 top
D4 "CG0603MLC-3.3LE" "ESD PROTECTOR" 28.95,93.425 r270 top
D6 "1N5819HW-7-F" 1N5819HW-7-F 18.375,80.35 r0 top
DP1 "MUR460" ONSC-AXIAL_LEAD-2-267-05_V 3.3,39.5 r270 top
DP2 "MUR460" ONSC-AXIAL_LEAD-2-267-05_V 9.775,39.425 r270 top
DP3 "MUR460" ONSC-AXIAL_LEAD-2-267-05_V 3.25,21.775 r90 top
DP4 "MUR460" ONSC-AXIAL_LEAD-2-267-05_V 9.4,21.775 r90 top
DP5 "1.5KE16A" DIOAD1586W101L900D530 9.775,60.25 r270 top
F1 "MF-RX375_72-0" MFRX375720 2.45,58.725 r90 top
GND "" TestPoint 58.5,24.75 r90 top
J1 "TSW-106-07-G-S" SMTC-TSW-106-07-X-S 37.3,97.3 r180 top
J2 "53261-0671" 53261-0671 56.975,92.975 r90 top
JP6 "Jumper_Header 2x1 Fitted" CON_SAMTEC_TSW-102-07-G-S 48.2,92.4 r180 top value="Shunt Fitted"
JP7 "Jumper_Header 2x1 Fitted" CON_SAMTEC_TSW-102-07-G-S 49.256,48.024 r0 top value="Shunt Fitted"
JP8 "Jumper_Header 2x1 Fitted" CON_SAMTEC_TSW-102-07-G-S 30.7,18.95 r90 top value="Shunt Fitted"
L1 "Inductor" L0805_H0P9 36.716,56.529 r270 top value="2.2uH, 1.2A"
L2 "BEAD" L0603 34.866,34.254 r180 top value=600R@100MHz
L? "220uH" INDP125125X600N 19.25,88.575 r0 top
LD1 "LED_green" LED_0603_OSRAM_LG-Q396-PS-35_GREEN_1A2K_H0P4 44.241,106.897 r90 top locked value=GREEN
LD2 "LED_yellow" LED_0603_OSRAM_LY-Q396-P1Q2-36_YELLOW_1A2K_H0P4 40.716,106.897 r90 top value=YELLOW
LD3 "LED_red" LED_0603_OSRAM_LS-Q976-NR-1_RED_1A2K_H0P8 37.308,106.897 r90 top value=RED
LD5 "LED_green" LED_0603_OSRAM_LG-Q396-PS-35_GREEN_1A2K_H0P4 58.248,106.518 r90 top value=GREEN
LD7 "LED_red" LED_0603_VISHAY_VLMS1300-GS08_RED_1A2K_H0P8 31.966,3.129 r90 top value=RED
LD8 "LED_green" LED_0603_OSRAM_LG-Q396-PS-35_GREEN_1A2K_H0P4 36.341,3.129 r90 top value=GREEN
PCAN "PESD5V2S2UT" PEDS1CAN 3.675,102.725 r90 top
PWR "" TECO-282836-2_V 6.575,5.1 r0 top
Q1 "9013-SOT23" NPN_SOT23 44.241,106.547 r180 bottom value="NPN SOT23"
Q2 "9013-SOT23" NPN_SOT23 40.716,106.547 r180 bottom value="NPN SOT23"
Q3 "9013-SOT23" NPN_SOT23 37.308,106.547 r180 bottom value="NPN SOT23"
R1 "3.6KΩ" Resistor_0805_Generic 10.225,80.15 r180 top
R2 "1.2KΩ" Resistor_0805_Generic 10.25,78.05 r180 top
R3 "330mΩ" Resistor_0805_Generic 10.225,74.95 r180 top
R12 "Resistor" R0603 58.248,104.018 r270 top value=620R
R25 "Resistor" R0402 55.868,104.878 r270 top value=10K
R26 "Resistor" R0603 37.316,104.279 r270 top value=360R
R27 "Resistor" R0603 40.716,104.279 r270 top value=470R
R28 "Resistor" R0402 44.241,104.579 r270 top value=270R
R33 "Resistor" R0402 32.391,87.079 r90 top value=0R
R34 "Resistor" R0402 32.391,84.979 r90 top value=0R
R35 "Resistor" R0402 53.216,78.029 r0 top value=0R
R36 "Resistor" R0603 24.516,66.904 r180 top value=10K
R37 "Resistor" R0603 24.466,64.153 r180 top value=10K
R38 "Resistor" R0603 24.466,62.779 r180 top value=10K
R39 "Resistor" R0603 48.766,58.454 r180 top value=0R
R40 "Resistor" R0603 53.166,58.329 r180 top value=0R
R41 "Resistor" R0603 32.716,53.679 r270 top value=0R
R42 "Resistor" R0603 34.216,53.679 r90 top value=0R
R43 "Resistor" R0402 36.566,43.254 r90 top value=10K
R44 "Resistor" R0402 37.616,43.254 r270 top value=33R
R45 "Resistor" R0402 39.666,43.254 r90 top value=10K
R46 "Resistor" R0402 42.391,43.254 r90 top value=10K
R47 "Resistor" R0402 43.441,43.254 r270 top value=33R
R48 "Resistor" R0402 44.491,43.254 r270 top value=33R
R49 "Resistor" R0402 45.541,43.254 r90 top value=10K
R50 "Resistor" R0402 37.291,41.879 r180 top value=1K5
R51 "Resistor" R0402 37.291,40.829 r180 top value=10K
R52 "Resistor" R0402 37.291,39.779 r0 top value=33R
R53 "Resistor" R0402 45.666,39.279 r180 top value=0R
R54 "Resistor" R0402 45.316,35.279 r0 top value=12K1
R55 "Resistor" R0402 38.291,19.804 r90 top value=75R
R56 "Resistor" R0402 52.616,19.804 r90 top value=75R
R57 "Resistor" R0402 36.191,18.904 r270 top value=75R
R58 "Resistor" R0402 37.241,18.904 r270 top value=75R
R59 "Resistor" R0402 35.166,14.079 r90 top value=47K
R60 "Resistor" R0402 38.941,13.373 r90 top value=10K
R61 "Resistor" R0402 57.966,11.529 r90 top value=270R
R62 "Resistor" R0402 38.966,11.479 r270 top value=270R
R63 "Resistor" R0402 30.366,11.379 r90 top value=10K
R64 "Resistor" R0402 35.491,11.424 r0 top value=47K
R65 "Resistor" R0402 32.241,9.854 r0 top value=47K
R66 "Resistor" R0402 34.041,9.854 r180 top value=10K
R67 "Resistor" R0603 20.229,14.184 r180 top value=100K
R68 "Resistor" R0402 33.191,2.829 r90 top value=360R
R69 "Resistor" R0402 37.566,2.829 r90 top value=270R
R71 "Resistor" R0603 44.511,103.785 r0 bottom value=100K
R72 "Resistor" R0603 40.966,103.779 r0 bottom value=100K
R73 "Resistor" R0603 37.566,103.779 r0 bottom value=100K
R74 "Resistor" R0603 40.966,102.379 r0 bottom value=47K
R75 "Resistor" R0603 37.566,102.379 r0 bottom value=47K
R76 "Resistor" R0603 44.514,102.367 r0 bottom value=47K
R77 "Resistor" R0603 34.366,55.304 r270 bottom value=330R
R78 "Resistor" R0402 43.291,34.779 r270 bottom value=49.9R
R79 "Resistor" R0402 42.291,34.779 r270 bottom value=49.9R
R80 "Resistor" R0402 41.291,34.779 r270 bottom value=49.9R
R81 "Resistor" R0402 40.291,34.779 r270 bottom value=49.9R
Rcan "120Ω" Resistor_0805_Generic 7.625,106.975 r90 top
SB3 "SB_ON" SOLDER-BRIDGE_R0603-0R 41.716,57.604 r270 top
SB4 "SB_ON" SOLDER-BRIDGE_R0603-0R 43.066,57.604 r270 top
SB11 "SB_ON" SOLDER-BRIDGE_R0603-0R 52.966,88.729 r90 bottom
SB12 "SB_ON" SOLDER-BRIDGE_R0603-0R 51.566,88.729 r90 bottom
SB15 "SB_ON" SOLDER-BRIDGE_R0603-0R 52.966,85.929 r90 bottom
SB16 "SB_ON" SOLDER-BRIDGE_R0603-0R 51.566,85.929 r90 bottom
SB17 "SB_ON" SOLDER-BRIDGE_R0603-0R 48.125,85.975 r90 bottom
SB18 "SB_ON" SOLDER-BRIDGE_R0603-0R 43.741,85.929 r90 bottom
SB19 "SB_ON" SOLDER-BRIDGE_R0603-0R 42.391,85.929 r90 bottom
SB21 "SB_ON" SOLDER-BRIDGE_R0603-0R 36.966,85.929 r90 bottom
SB25 "SB_ON" SOLDER-BRIDGE_R0603-0R 52.966,82.879 r270 bottom
SB26 "SB_ON" SOLDER-BRIDGE_R0603-0R 33.366,82.129 r270 bottom
SB27 "SB_ON" SOLDER-BRIDGE_R0603-0R 31.866,82.129 r270 bottom
SB29 "SB_ON" SOLDER-BRIDGE_R0603-0R 41.216,77.604 r270 bottom
SB32 "SB_ON" SOLDER-BRIDGE_R0603-0R 36.091,76.854 r0 bottom
SB36 "SB_ON" SOLDER-BRIDGE_R0603-0R 24.491,75.479 r0 bottom
SB46 "SB_ON" SOLDER-BRIDGE_R0603-0R 24.491,72.754 r0 bottom
SB48 "SB_ON" SOLDER-BRIDGE_R0603-0R 44.266,71.504 r0 bottom
SB50 "SB_ON" SOLDER-BRIDGE_R0603-0R 24.491,71.404 r0 bottom
SB52 "SB_ON" SOLDER-BRIDGE_R0603-0R 44.266,70.154 r180 bottom
SB54 "SB_ON" SOLDER-BRIDGE_R0603-0R 53.416,69.729 r0 bottom
SB61 "SB_ON" SOLDER-BRIDGE_R0603-0R 46.291,66.979 r270 bottom
SB63 "SB_ON" SOLDER-BRIDGE_R0603-0R 53.416,67.029 r180 bottom
SB64 "SB_ON" SOLDER-BRIDGE_R0603-0R 24.491,66.629 r0 bottom
SB65 "SB_ON" SOLDER-BRIDGE_R0603-0R 53.416,65.679 r0 bottom
SB66 "SB_ON" SOLDER-BRIDGE_R0603-0R 33.266,64.329 r270 bottom
SB67 "SB_ON" SOLDER-BRIDGE_R0603-0R 31.916,64.329 r270 bottom
SB68 "SB_ON" SOLDER-BRIDGE_R0603-0R 46.291,64.154 r270 bottom
SB71 "SB_ON" SOLDER-BRIDGE_R0603-0R 42.016,64.154 r90 bottom
SB72 "SB_ON" SOLDER-BRIDGE_R0603-0R 40.616,64.154 r90 bottom
SB74 "SB_ON" SOLDER-BRIDGE_R0603-0R 37.609,64.153 r270 bottom
SB75 "SB_ON" SOLDER-BRIDGE_R0603-0R 36.115,64.153 r270 bottom
SB76 "SB_ON" SOLDER-BRIDGE_R0603-0R 34.716,64.153 r270 bottom
SB79 "SB_ON" SOLDER-BRIDGE_R0603-0R 36.066,61.229 r270 bottom
SB80 "SB_ON" SOLDER-BRIDGE_R0603-0R 53.416,61.629 r0 bottom
SB81 "SB_ON" SOLDER-BRIDGE_R0603-0R 53.391,58.879 r180 bottom
SB82 "SB_ON" SOLDER-BRIDGE_R0603-0R 34.466,58.029 r90 bottom
SB83 "SB_ON" SOLDER-BRIDGE_R0603-0R 32.966,58.029 r90 bottom
SB84 "SB_ON" SOLDER-BRIDGE_R0603-0R 44.866,57.604 r90 bottom
SB90 "SB_ON" SOLDER-BRIDGE_R0603-0R 43.166,57.604 r270 bottom
SB91 "SB_ON" SOLDER-BRIDGE_R0603-0R 41.291,55.629 r270 bottom
SB92 "SB_ON" SOLDER-BRIDGE_R0603-0R 38.741,55.029 r270 bottom
SB94 "SB_ON" SOLDER-BRIDGE_R0603-0R 53.391,53.554 r0 bottom
SB96 "SB_ON" SOLDER-BRIDGE_R0603-0R 53.391,52.204 r180 bottom
SB98 "SB_ON" SOLDER-BRIDGE_R0603-0R 36.791,39.279 r0 bottom
SB100 "SB_ON" SOLDER-BRIDGE_R0603-0R 50.225,34.775 r0 bottom
SB101 "SB_ON" SOLDER-BRIDGE_R0603-0R 38.175,7.075 r180 bottom
SB102 "SB_ON" SOLDER-BRIDGE_R0603-0R 59.375,2.825 r90 top
SB103 "SB_ON" SOLDER-BRIDGE_R0603-0R 49.825,85.975 r270 bottom
SB104 "SB_ON" SOLDER-BRIDGE_R0603-0R 54.25,42.025 r180 bottom
SERIAL "TSW-103-07-F-S" SMTC-TSW-103-07-X-S 58.725,78.655 r270 top
SW "Switch_Slide" Switch_Slide 1.95,82.775 r270 top
T1 "9013-SOT23" NPN_SOT23 33.491,7.354 r270 top value="NPN SOT23"
TJA1050 "TJA1050T/CM,118" TJA1050T 14.65,104.55 r180 top
TP "" TestPoint 15.325,71.675 r0 top
TP2 "" TestPoint 23.25,73.8 r0 top
TP3 "" TestPoint 28.025,87.1 r90 top
TP4 "Test Point" TP_SMD_1MM 36.116,85.129 r0 top
TP? "" TestPoint 13.875,80.2 r0 top
TP_CH "" TestPoint 3.725,108 r90 top
TP_CL "" TestPoint 3.7,105.925 r90 top
U11 "ST1L05CPU33R" ICC_DFN6-EPAD_3X3_P095 52.2,105.725 r180 top value="ST1L05CPU33R 3.3V 1.3A"
U12 "LD1117S50TR" REG_SOT223-TAB 31.4,104.1 r270 top
U14 "STM32H7_LQFP144_SMPS" ICC_LQFP144_20X20_P050_SOCKET_YAMAICHI_IC149-144-145-B5_NM 39.216,71.704 r90 top locked value=STM32H745ZIT6U
U15 "AZ34063UMTR-G1" AZ34063UMTR-G1 17.35,75.775 r180 top
U15 "LAN8742A-CZ-TR" ICC_VQFN24-EPAD_4X4_P050 41.791,39.029 r180 top
U16 "USBLC6-4SC6" ESD_SOT23-6L 41.791,32.679 r180 top
U17 "KMS-1102NL" TRS_DGKYD_KMS-1102NL 45.446,23.259 r180 top
U18 "STMPS2141STR" MOS_SOT23-5L 32.791,12.524 r0 top
U19 "USBLC6-2SC6" ESD_SOT23-6L 25.266,8.679 r180 top locked
U20 "ESD-TRANSIL" ESD_ST0201 58.45,9.175 r270 top value=ESDALC6V1-1U2
U21 "ESD-TRANSIL" ESD_QFN2_1P6X1_P125 28.966,6.529 r0 top value=ESDA7P60-1U1M
U22 "ESD-TRANSIL" ESD_ST0201 22.716,6.279 r180 top value=ESDALC6V1-1U2
U23 "ESD-TRANSIL" ESD_ST0201 18.204,14.184 r180 top value=ESDALC6V1-1U2
Vin5v "" TestPoint 6.225,79.375 r90 top
X2 "XTAL_4_PINS" CRY_NX2016SA_4P 42.066,54.929 r0 top value="NX2016SA 25MHz"
X3 "XTAL_2_PINS" CRY_NX3215SA_2P 33.391,51.332 r180 top value="NX3215SA 32.768KHz"
X4 "XTAL_4_PINS" CRY_NX2016SA_4P 47.766,39.779 r90 top value="NX2016SA 25MHz"

## Footprints (in the part's own frame and the unit in brackets; to place one, negate y for a bottom-side part, rotate by r counter-clockwise, add the part's x,y. Pads: shape width x height; smd on the part's side, far side on the other; paste and mask are expansions set on the pad)
1N5819HW-7-F [mm]
  rect 1.21x0.73 smd: A(1.68,0) C(-1.68,0)
  silkscreen extent -3.1,-0.85 1.43,0.85, body extent -1.83,-0.77 1.83,0.77, height 1.54
0402 [mm] "Chip Capacitor, Body 1.0x0.5mm, IPC High Density"
  rect 0.568x0.572 smd paste+0 mask+0: 1(-0.452,0) 2(0.452,0)
  silkscreen extent -0.95,-0.45 0.95,0.45, body extent -0.5,-0.25 0.5,0.25, height 0.6
53261-0671 [mm] "SMD, 4-Leads, Body 10.15x5.2mm, Pitch 1.25mm"
  rect 0.8x1.6 smd: 1(-3.125,1.45) 2(-1.875,1.45) 3(-0.625,1.45) 4(0.625,1.45) 5(1.875,1.45) 6(3.125,1.45)
  rect 2.1x3 smd: MP1(-5.675,-1.45) MP2(5.675,-1.45)
  silkscreen extent -6.33,-3.55 6.33,2.37, body extent -6.32,-3.55 6.33,1.65, height 3.2
AZ34063UMTR-G1 [mm]
  rrect54% 1.97x0.6 smd: 1(-2.475,1.905) 2(-2.475,0.635) 3(-2.475,-0.635) 4(-2.475,-1.905) 5(2.475,-1.905) 6(2.475,-0.635) 7(2.475,0.635) 8(2.475,1.905)
  silkscreen extent -2.77,-2.5 2,2.84, body extent -3,-2.45 3,2.45, height 1.7
C0402 [mm]
  rect 0.51x0.56 smd mask+0.05: 1(-0.45,0) 2(0.45,0)
  silkscreen extent -0.72,-0.35 0.72,0.35, body extent -0.5,-0.3 0.5,0.3, height 0.4
C0603 [mm]
  rect 0.64x0.89 smd mask+0.05: 1(-0.7,0) 2(0.7,0)
  silkscreen extent -1.05,-0.55 1.02,0.55, body extent -0.9,-0.5 0.9,0.5, height 1.4
C0805 [mm]
  rect 0.9x1.4 smd mask+0.05: 1(-0.85,0) 2(0.85,0)
  silkscreen extent -1.3,-0.77 1.3,0.77, body extent -1.1,-0.7 1.1,0.7, height 1.35
C1206_H1P6 [mm]
  rect 1.4x1.78 smd mask+0.05: 1(-1.4,0) 2(1.4,0)
  silkscreen extent -2.12,-0.97 2.15,0.97, body extent -1.7,-0.9 1.7,0.9, height 1.8
CAP_100uF [mm]
  rect 1.02x2.72 smd: 1(-1.4,0) 2(1.4,0)
  silkscreen extent 0,-1.15 0,1.15, body extent -1.6,-1.25 1.6,1.25, height 2.79
Capacitor_470uF [mm]
  rect 2.31x2.52 smd: 1(-3.1,0) 2(3.1,0)
  silkscreen extent -3.75,-2.25 3.75,2.25, body extent -3.65,-2.15 3.65,2.15, height 3.1
Capacitor_SMD_0805_Generic [mm] "Chip Capacitor, 2-Leads, Body 2,00x1,25mm, IPC Medium Density"
  rect 1.25x1.4 smd: 1(-0.825,0) 2(0.825,0)
  body extent -1.05,-0.67 1.05,0.67, height 1
CON_RJ45_DGKYD_KRJ-CB4.2GYZNL [mm] "RJ45  connector, right angle"
  rect 1x1 hole 0.7 mask+0.05: 1(3.57,10.6)
  round 1 hole 0.7 mask+0.05: 2(2.55,11.7) 3(1.53,10.6) 4(0.51,11.7) 5(-0.51,10.6) 6(-1.53,11.7) 7(-2.55,10.6) 8(-3.57,11.7) 9(7.06,9.52) 10(4.77,9.52) 11(-4.77,9.52) 12(-7.06,9.52)
  oval 1.3x2.8 hole 0.7 slot 2.2 at 90 deg mask+0.05: SH1(8.04,4.2) SH2(-8.04,4.2)
  Multi-Layer keep-out lines w0.1: -9,0 -7,0 -7,6.4 cw(c-7,7.3) -7,8.2 7,8.2 cw(c7,7.3) 7,6.4 7,0 9,0
  silkscreen extent -8.23,-4.1 8.22,11.45, body extent -8.39,-4.1 8.39,11.9, height 6.85
CON_SAMTEC_TSW-102-07-G-S [mm]
  rect 1.85x1.85 / inner round 1.85 / far side rect 1.85x1.85 hole 1 mask+0.05: 1(-1.27,0)
  round 1.85 hole 1 mask+0.05: 2(1.27,0)
  silkscreen extent -2.58,-1.3 2.58,1.3, body extent -2.67,-1.3 2.58,1.3, height 8.38
CON_USBMICROAB_MOLEX_47590-0001_H3 [mm]
  rect 0.4x1.35 smd mask+0.05: 1(1.3,4.125) 2(0.65,4.125) 3(0,4.125) 4(-0.65,4.125) 5(-1.3,4.125)
  oval 1.05x1.25 hole 0.65 slot 0.85 at 90 deg mask+0.05: 6(-2.225,4.45) 7(2.225,4.45)
  rrect50% 1.375x1.9 hole 0.6 slot 1.3 at 90 deg copper offset 0.188,0 mask+0.05: 8(-4.175,1.45)
  rrect50% 1.375x1.9 hole 0.6 slot 1.3 at 90 deg copper offset -0.188,0 mask+0.05: 9(4.175,1.45)
  rect 2.9x1.9 smd mask+0.05: 10(0,1.45)
  oval 0.85x2.425 hole 0.85 slot 2.425 at 90 deg unplated mask+0.1: 11(-2.375,0.8) 12(2.375,0.8)
  silkscreen extent -4.1,-1.3 4.1,4.3, body extent -4.32,-1.36 4.33,4.6, height 3
CRY_NX2016SA_4P [mm]
  rect 0.85x0.75 smd mask+0.05: 1(-0.675,-0.525) 2(0.675,-0.525) 3(0.675,0.525) 4(-0.675,0.525)
  silkscreen extent -1.22,-1.02 1.05,0.85, body extent -1.05,-0.85 1.05,0.85, height 0.7
CRY_NX3215SA_2P [mm]
  rect 1x1.8 smd mask+0.05: 1(-1.25,0) 2(1.25,0)
  silkscreen extent -0.63,-0.8 0.63,0.8, body extent -1.65,-0.8 1.65,0.8, height 0.9
DIOAD1586W101L900D530 [mm]
  round 1.89 hole 1.26: A(7.93,0)
  rect 1.89x1.89 hole 1.26: C(-7.93,0)
  silkscreen extent -9.85,-2.65 6.63,2.65, body extent -8.43,-2.8 8.43,2.8, height 5.6
"ESD PROTECTOR" [mm]
  rect 1.02x0.8 smd: 1(-0.787,0) 2(0.788,0)
  Top Layer pour cut-out: -0.178,-0.381 0.203,-0.381 0.203,0.381 -0.178,0.381
  silkscreen extent -0.86,-0.81 -0.01,0.3, body extent -0.79,-0.42 0.81,0.38, height 0.8
ESD_QFN2_1P6X1_P125 [mm]
  rect 0.55x0.8 smd mask+0.05: 1(-0.625,0) 2(0.625,0)
  silkscreen extent -1,-0.55 0.85,0.55, body extent -0.85,-0.55 0.85,0.55, height 0.61
ESD_SOT23-6L [mm]
  rect 0.6x1.2 smd mask+0.05: 1(-0.95,-1.15) 2(0,-1.15) 3(0.95,-1.15) 4(0.95,1.15) 5(0,1.15) 6(-0.95,1.15)
  silkscreen extent -1.53,-0.87 1.53,0.87, body extent -1.52,-1.5 1.52,1.5, height 1.45
ESD_ST0201 [mm]
  rect 0.425x0.33 smd mask+0.05: 1(-0.312,0) 2(0.312,0)
  silkscreen extent -0.55,-0.3 0.33,0.3, body extent -0.34,-0.18 0.34,0.18, height 0.34
ICC_DFN6-EPAD_3X3_P095 [mm]
  rect 0.45x0.5 smd mask+0.05: 1(-0.95,-1.3) 2(0,-1.3) 3(0.95,-1.3) 4(0.95,1.3) 5(0,1.3) 6(-0.95,1.3)
  rect 2.5x1.7 smd mask+0.05: EP(0,0)
  silkscreen extent -1.55,-1.55 1.55,1.55, body extent -1.55,-1.55 1.55,1.55, height 1
ICC_LQFP144_20X20_P050_SOCKET_YAMAICHI_IC149-144-145-B5_NM [mm]
  rect 1x2.5 smd rot 45 mask+0.05: 0(-10.96,-10.96) 0(10.96,10.96)
  rect 1x2.5 smd rot 135 mask+0.05: 0(-10.96,10.96) 0(10.96,-10.96)
  round 0 hole 1.5 unplated mask+0.05: 0(0,8) 0(0,-8)
  rect 1.65x0.5 smd mask+0.05: 1(-10.825,8.85) 36(-10.825,-8.85) 73(10.825,-8.85) 108(10.825,8.85)
  rect 1.65x0.3 smd mask+0.05: 2(-10.825,8.25) 3(-10.825,7.75) 4(-10.825,7.25) 5(-10.825,6.75) 6(-10.825,6.25) 7(-10.825,5.75) 8(-10.825,5.25) 9(-10.825,4.75) 10(-10.825,4.25) 11(-10.825,3.75) 12(-10.825,3.25) 13(-10.825,2.75) 14(-10.825,2.25) 15(-10.825,1.75) 16(-10.825,1.25) 17(-10.825,0.75) 18(-10.825,0.25) 19(-10.825,-0.25) 20(-10.825,-0.75) 21(-10.825,-1.25) 22(-10.825,-1.75) 23(-10.825,-2.25) 24(-10.825,-2.75) 25(-10.825,-3.25) 26(-10.825,-3.75) 27(-10.825,-4.25) 28(-10.825,-4.75) 29(-10.825,-5.25) 30(-10.825,-5.75) 31(-10.825,-6.25) 32(-10.825,-6.75) 33(-10.825,-7.25) 34(-10.825,-7.75) 35(-10.825,-8.25) 74(10.825,-8.25) 75(10.825,-7.75) 76(10.825,-7.25) 77(10.825,-6.75) 78(10.825,-6.25) 79(10.825,-5.75) 80(10.825,-5.25) 81(10.825,-4.75) 82(10.825,-4.25) 83(10.825,-3.75) 84(10.825,-3.25) 85(10.825,-2.75) 86(10.825,-2.25) 87(10.825,-1.75) 88(10.825,-1.25) 89(10.825,-0.75) 90(10.825,-0.25) 91(10.825,0.25) 92(10.825,0.75) 93(10.825,1.25) 94(10.825,1.75) 95(10.825,2.25) 96(10.825,2.75) 97(10.825,3.25) 98(10.825,3.75) 99(10.825,4.25) 100(10.825,4.75) 101(10.825,5.25) 102(10.825,5.75) 103(10.825,6.25) 104(10.825,6.75) 105(10.825,7.25) 106(10.825,7.75) 107(10.825,8.25)
  rect 0.5x1.65 smd mask+0.05: 37(-8.85,-10.825) 72(8.85,-10.825) 109(8.85,10.825) 144(-8.85,10.825)
  rect 0.3x1.65 smd mask+0.05: 38(-8.25,-10.825) 39(-7.75,-10.825) 40(-7.25,-10.825) 41(-6.75,-10.825) 42(-6.25,-10.825) 43(-5.75,-10.825) 44(-5.25,-10.825) 45(-4.75,-10.825) 46(-4.25,-10.825) 47(-3.75,-10.825) 48(-3.25,-10.825) 49(-2.75,-10.825) 50(-2.25,-10.825) 51(-1.75,-10.825) 52(-1.25,-10.825) 53(-0.75,-10.825) 54(-0.25,-10.825) 55(0.25,-10.825) 56(0.75,-10.825) 57(1.25,-10.825) 58(1.75,-10.825) 59(2.25,-10.825) 60(2.75,-10.825) 61(3.25,-10.825) 62(3.75,-10.825) 63(4.25,-10.825) 64(4.75,-10.825) 65(5.25,-10.825) 66(5.75,-10.825) 67(6.25,-10.825) 68(6.75,-10.825) 69(7.25,-10.825) 70(7.75,-10.825) 71(8.25,-10.825) 110(8.25,10.825) 111(7.75,10.825) 112(7.25,10.825) 113(6.75,10.825) 114(6.25,10.825) 115(5.75,10.825) 116(5.25,10.825) 117(4.75,10.825) 118(4.25,10.825) 119(3.75,10.825) 120(3.25,10.825) 121(2.75,10.825) 122(2.25,10.825) 123(1.75,10.825) 124(1.25,10.825) 125(0.75,10.825) 126(0.25,10.825) 127(-0.25,10.825) 128(-0.75,10.825) 129(-1.25,10.825) 130(-1.75,10.825) 131(-2.25,10.825) 132(-2.75,10.825) 133(-3.25,10.825) 134(-3.75,10.825) 135(-4.25,10.825) 136(-4.75,10.825) 137(-5.25,10.825) 138(-5.75,10.825) 139(-6.25,10.825) 140(-6.75,10.825) 141(-7.25,10.825) 142(-7.75,10.825) 143(-8.25,10.825)
  silkscreen extent -10.1,-10.1 10.1,10.1, body extent -11,-11 11,11, height 1.6
ICC_VQFN24-EPAD_4X4_P050 [mm]
  rrect50% 0.85x0.3 smd mask+0.05: 1(-1.95,1.25) 2(-1.95,0.75) 3(-1.95,0.25) 4(-1.95,-0.25) 5(-1.95,-0.75) 6(-1.95,-1.25) 13(1.95,-1.25) 14(1.95,-0.75) 15(1.95,-0.25) 16(1.95,0.25) 17(1.95,0.75) 18(1.95,1.25)
  rrect50% 0.3x0.85 smd mask+0.05: 7(-1.25,-1.95) 8(-0.75,-1.95) 9(-0.25,-1.95) 10(0.25,-1.95) 11(0.75,-1.95) 12(1.25,-1.95) 19(1.25,1.95) 20(0.75,1.95) 21(0.25,1.95) 22(-0.25,1.95) 23(-0.75,1.95) 24(-1.25,1.95)
  rect 2.6x2.6 smd paste-10 mask+0.05: EP(0,0)
  silkscreen extent -2,-2 2,2, body extent -2.05,-2.05 2.05,2.05, height 1.1
INDP125125X600N [mm]
  rect 2.9x5.4 smd: 1(-4.85,0) 2(4.85,0)
  silkscreen extent -6.25,-6.25 6.25,6.25, body extent -6,-6 6,6, height 8
L0603 [mm]
  rect 0.8x0.95 smd mask+0.05: 1(-0.8,0) 2(0.8,0)
  silkscreen extent -1.33,-0.6 1.33,0.6, body extent -0.87,-0.47 0.87,0.47, height 0.95
L0805_H0P9 [mm]
  rect 1.1x1.6 smd mask+0.05: 1(-0.75,0) 2(0.75,0)
  silkscreen extent -0.08,-0.7 0.08,0.7, body extent -1.07,-0.7 1.07,0.7, height 1.2
LED_0603_OSRAM_LG-Q396-PS-35_GREEN_1A2K_H0P4 [mm]
  rect 0.8x0.8 smd mask+0.05: 1(-0.75,0) 2(0.75,0)
  silkscreen extent -0.85,-0.53 1.28,0.53, body extent -0.85,-0.45 0.85,0.45, height 0.6
LED_0603_OSRAM_LS-Q976-NR-1_RED_1A2K_H0P8 [mm]
  rect 0.8x0.8 smd mask+0.05: 1(-0.75,0) 2(0.75,0)
  silkscreen extent -0.85,-0.53 1.28,0.53, body extent -0.85,-0.45 0.85,0.45, height 0.8
LED_0603_OSRAM_LY-Q396-P1Q2-36_YELLOW_1A2K_H0P4 [mm]
  rect 0.8x0.8 smd mask+0.05: 1(-0.75,0) 2(0.75,0)
  silkscreen extent -0.85,-0.53 1.28,0.53, body extent -0.85,-0.45 0.85,0.45, height 0.4
LED_0603_VISHAY_VLMS1300-GS08_RED_1A2K_H0P8 [mm]
  rect 0.8x0.8 smd mask+0.05: 1(-0.75,0) 2(0.75,0)
  silkscreen extent -0.85,-0.53 1.28,0.53, body extent -0.85,-0.45 0.85,0.45, height 0.8
MFRX375720 [mm]
  round 1.515 hole 1.01: 1(0,0) 2(10.2,0)
  silkscreen extent -6.66,-1.55 16.86,1.55, body extent -6.61,-1.51 16.9,1.51, height 24.11
MOS_SOT23-5L [mm]
  rect 0.6x1.3 smd mask+0.05: 1(-0.95,-1.1) 2(0,-1.1) 3(0.95,-1.1) 4(0.95,1.1) 5(-0.95,1.1)
  silkscreen extent -1.6,-0.95 1.6,0.97, body extent -1.52,-1.25 1.52,1.25, height 1.45
NPN_SOT23 [mm]
  rect 1x1.4 smd mask+0.05: 1(-0.95,-1.1) 2(0.95,-1.1) 3(0,1.1)
  silkscreen extent -1.63,-0.82 1.63,0.82, body extent -1.56,-1.25 1.56,1.25, height 1.1
ONSC-AXIAL_LEAD-2-267-05_V [mm] "AXIAL, 2-Leads, Diameter 5.05mm"
  round 2.05 hole 1.55: 1(-8.255,0) 2(6.745,0)
  silkscreen extent -7.1,-2.52 5.59,2.52, body extent -8.89,-2.65 7.36,2.65, height 5.3
PEDS1CAN [mm]
  rect 0.8x0.9 smd: 1(-0.95,-1) 2(0.95,-1) 3(0,1.1)
  silkscreen extent -1.4,-0.1 1.4,0.7, body extent -1.45,-1.15 1.45,1.15, height 1.1
R0402 [mm]
  rect 0.51x0.7 smd mask+0.05: 1(-0.45,0) 2(0.45,0)
  silkscreen extent -0.72,-0.43 0.72,0.43, body extent -0.52,-0.3 0.52,0.3, height 0.4
R0603 [mm]
  rect 0.64x1 smd mask+0.05: 1(-0.7,0) 2(0.7,0)
  silkscreen extent -1.05,-0.58 1.05,0.58, body extent -0.9,-0.5 0.9,0.5, height 0.56
REG_SOT223-TAB [mm]
  rect 1.5x1.65 smd mask+0.05: 1(-2.3,-3.175) 2(0,-3.175) 3(2.3,-3.175)
  rect 3.5x1.65 smd mask+0.05: 4(0,3.175)
  silkscreen extent -3.35,-2.15 3.35,2.12, body extent -3.35,-3.48 3.35,3.48, height 1.8
Resistor_0805_Generic [mm] "Chip Resistor, 2-Leads, Body 2,00x1,25mm, IPC Medium Density"
  rect 1x1.35 smd: 1(-0.9,0) 2(0.9,0)
  silkscreen extent -0.1,-0.58 0.1,0.58, body extent -1.05,-0.67 1.05,0.67, height 0.6
SMTC-TSW-103-07-X-S [mm] ".025 SQ Post Terminal Strip Assembly, 1x3 Pins, Vertical, 2.54mm Pitch, Male"
  rect 1.55x1.55 hole 1.02: 1(0,0)
  round 1.55 hole 1.02: 2(2.54,0) 3(5.08,0)
  silkscreen extent -1.46,-1.27 6.54,1.27, body extent -1.27,-1.27 6.35,1.27, height 8.38
SMTC-TSW-106-07-X-S [mm] ".025 SQ Post Terminal Strip Assembly, 1x6 Pins, Vertical, 2.54mm Pitch, Male"
  rect 1.55x1.55 hole 1.02: 1(0,0)
  round 1.55 hole 1.02: 2(2.54,0) 3(5.08,0) 4(7.62,0) 5(10.16,0) 6(12.7,0)
  silkscreen extent -1.46,-1.27 14.16,1.27, body extent -1.27,-1.24 13.97,1.3, height 8.38
SOLDER-BRIDGE_R0603-0R [mil]
  round 10 smd paste-393.7 mask+4: 1(-19.68,0) 2(23.62,0)
  Top Layer region: -47.24,-19.68 -47.24,19.68 -15.75,19.68 3.94,0 -15.75,-19.68 -47.24,-19.68
  Top Layer region: -5.91,19.68 13.78,0 -5.91,-19.68 47.24,-19.68 47.24,19.68 -5.91,19.68
  silkscreen extent -50,-23 50,23, body extent -36,-20 36,20, height 22
SWI_WEALTHMETAL_TD-0341_4P_BLACK [mm]
  rect 1.52x2.16 smd mask+0.05: 1(-2.25,-4.75) 2(-2.25,4.75) 3(2.25,-4.75) 4(2.25,4.75)
  silkscreen extent -3,-3.5 3,3.5, body extent -3,-5.15 3,5.15, height 7.55
SWI_WEALTHMETAL_TD-0341_4P_BLUE [mm]
  rect 1.52x2.16 smd mask+0.05: 1(-2.25,-4.75) 2(-2.25,4.75) 3(2.25,-4.75) 4(2.25,4.75)
  silkscreen extent -3,-3.5 3,3.5, body extent -3,-5.15 3,5.15, height 7.55
Switch_Slide [mm]
  rect 0.7x1.1 smd: 1(-2.25,2.05) 2(0.75,2.05) 3(2.25,2.05)
  rect 1x0.8 smd: G1(-3.75,1.15) G2(3.75,1.15) G3(-3.75,-1.15) G4(3.75,-1.15)
  round 0.9 hole 0.9 unplated: ""(-1.5,0) ""(1.5,0)
  silkscreen extent -3.35,-2.85 3.35,3.15, body extent -3.85,-2.85 3.85,2.25, height 1.5
TECO-282836-2_V [mm] "Female Header, Pitch 5mm, 1 x 2 Position, Height 10mm"
  rect 1.6x1.6 hole 1.1: 1(-2.5,0)
  round 1.6 hole 1.1: 2(2.5,0)
  silkscreen extent -5.6,-4.1 5,4.88, body extent -5.6,-4.1 5,4.1, height 10
TestPoint [mm]
  round 1.2 smd paste-0.6: 1(0,0)
  silkscreen extent -0.84,-0.84 0.84,0.84
TJA1050T [mm]
  rrect25% 1.75x0.59 smd: 1(-2.585,1.905) 2(-2.585,0.635) 3(-2.585,-0.635) 4(-2.585,-1.905) 5(2.585,-1.905) 6(2.585,-0.635) 7(2.585,0.635) 8(2.585,1.905)
  silkscreen extent -4.2,-2.52 1.95,2.52, body extent -3,-2.45 3,2.45, height 1.75
TP_SMD_1MM [mm]
  round 1 smd paste-10 mask+0.05: 1(0,0)
  silkscreen extent -0.7,-0.7 0.7,0.7
TRS_DGKYD_KMS-1102NL [mm]
  rect 0.64x1.55 smd mask+0.05: 1(-4.445,-4.575) 2(-3.175,-4.575) 3(-1.905,-4.575) 4(-0.635,-4.575) 5(0.635,-4.575) 6(1.905,-4.575) 7(3.175,-4.575) 8(4.445,-4.575) 9(4.445,4.575) 10(3.175,4.575) 11(1.905,4.575) 12(0.635,4.575) 13(-0.635,4.575) 14(-1.905,4.575) 15(-3.175,4.575) 16(-4.445,4.575)
  silkscreen extent -6.35,-3.7 6.35,3.7, body extent -6.35,-4.7 6.35,4.7, height 6.3